# Altium PCB bdcmc.PcbDoc (part 1 of 2)
Units mm, origin at the board's own origin, x right, y up, seen from the top; angles counter-clockwise.
Board outline 100.53 x 64.8 mm, 4 copper layers (Top Layer, Layer 1, Layer 2, Bottom Layer), stack 1.601 mm thick; 206 components, 95 nets, 604 pads, 256 vias.
Unrouted connection lines stored in the file: 2.
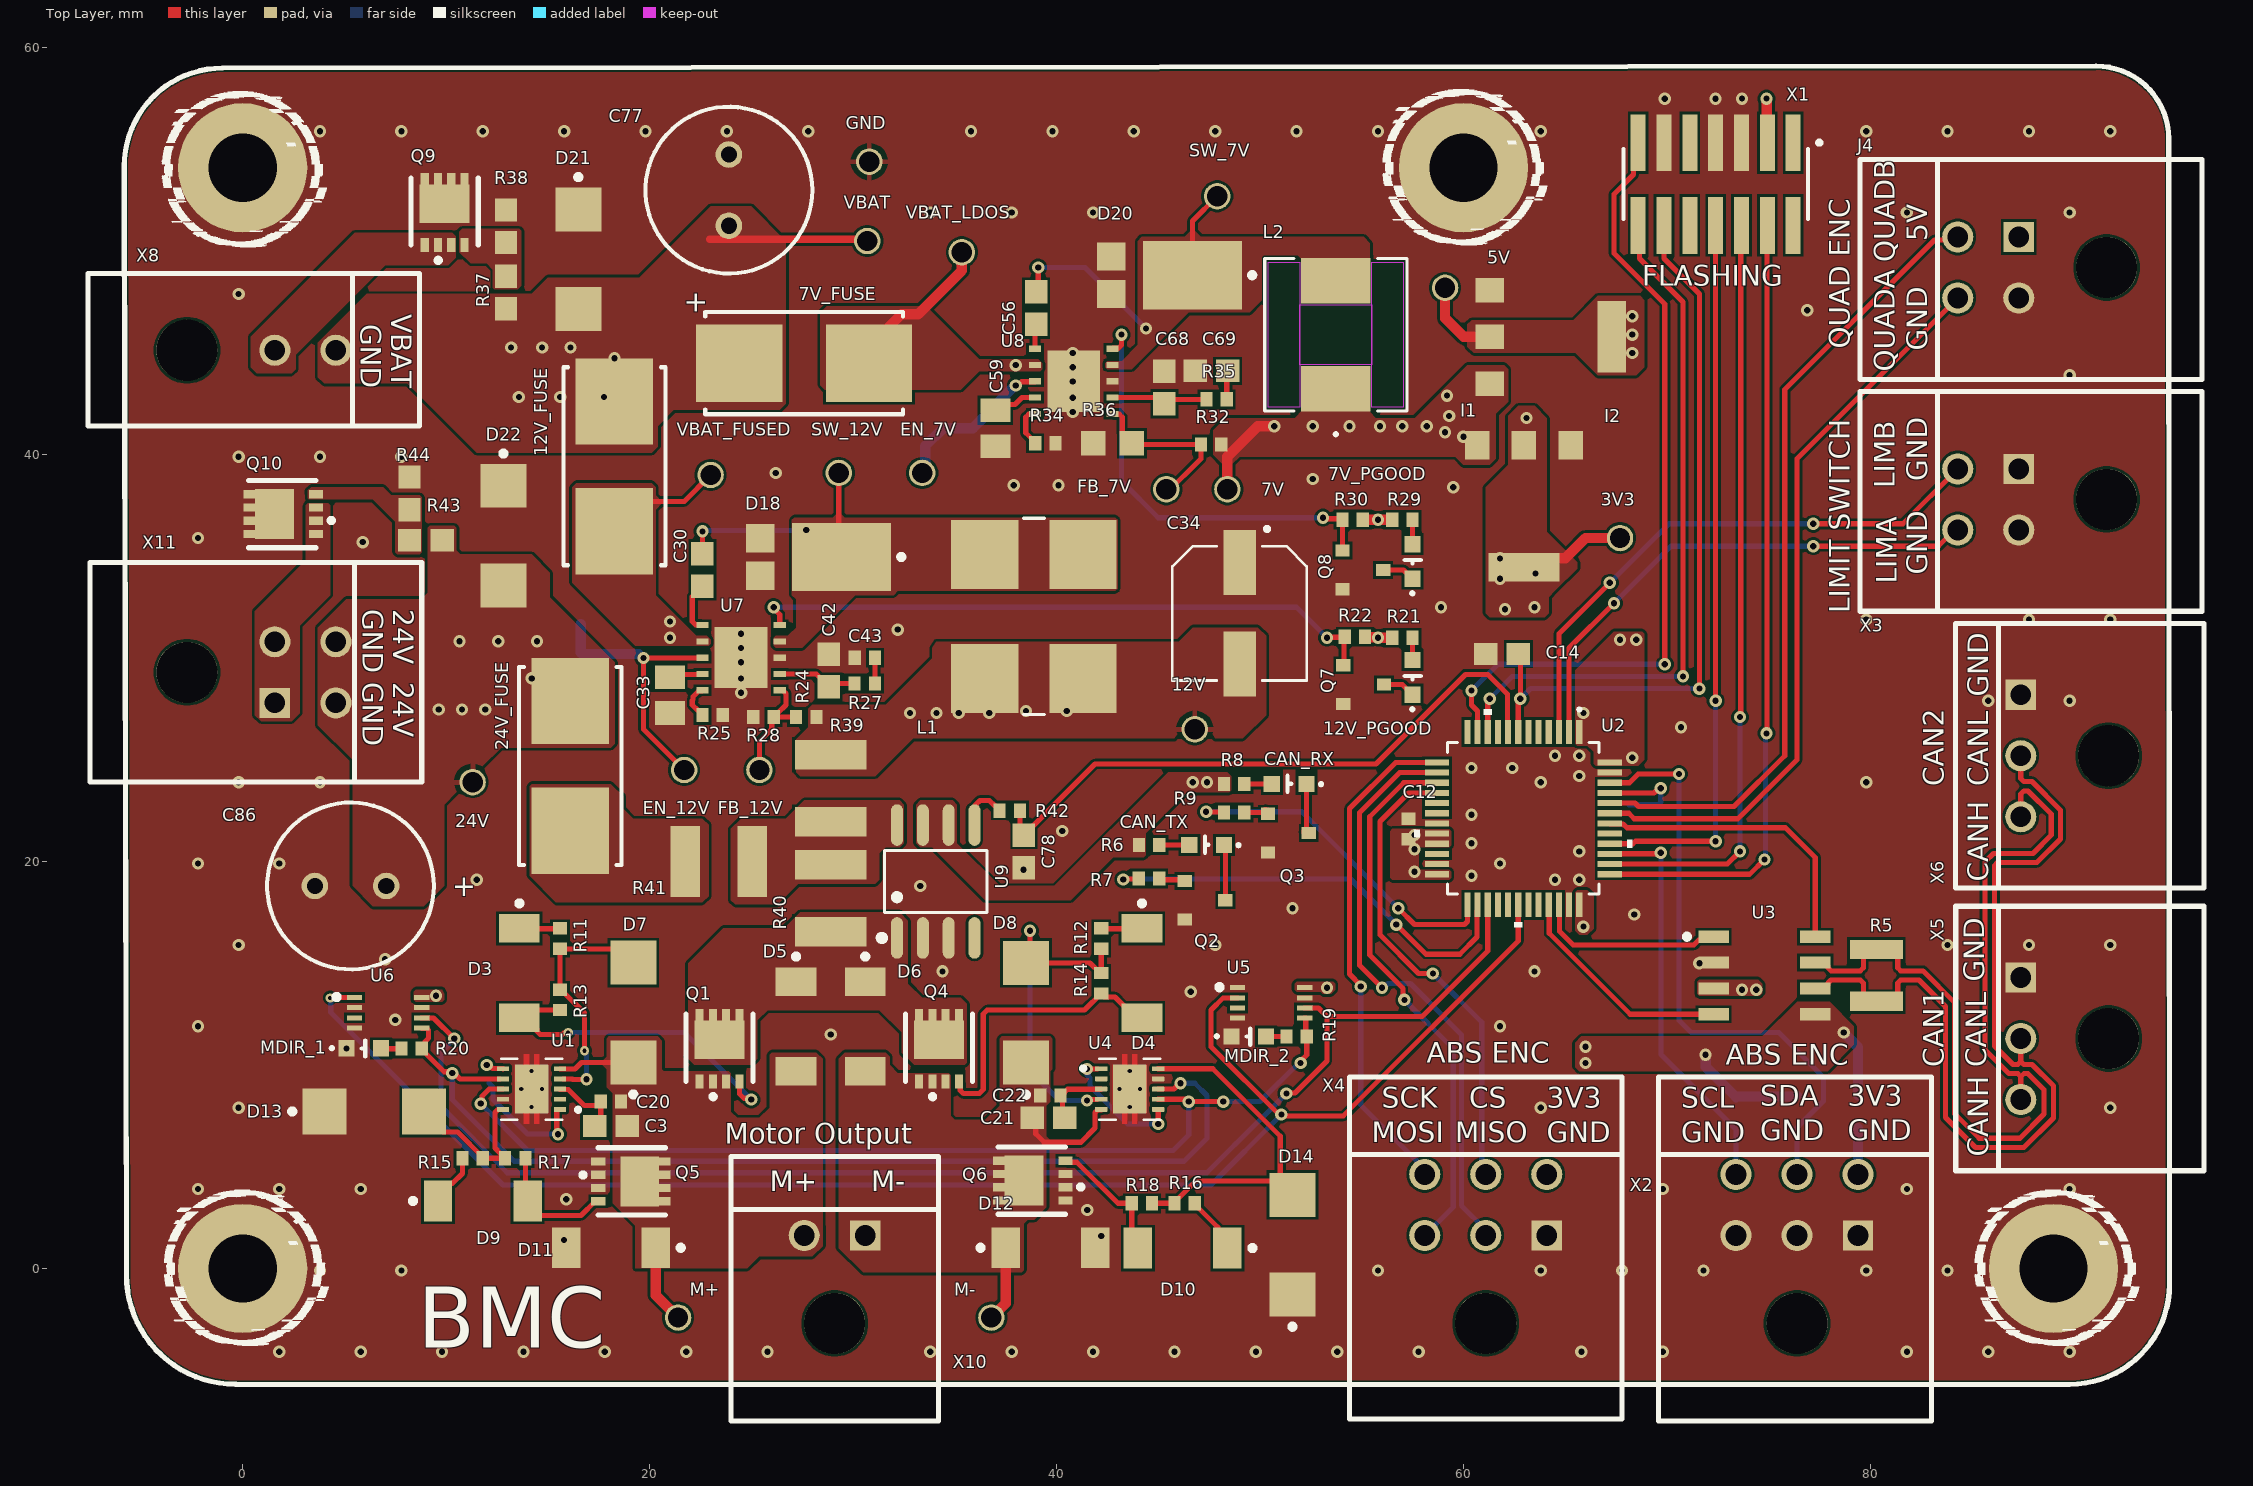
[diagram p0: Top Layer view]
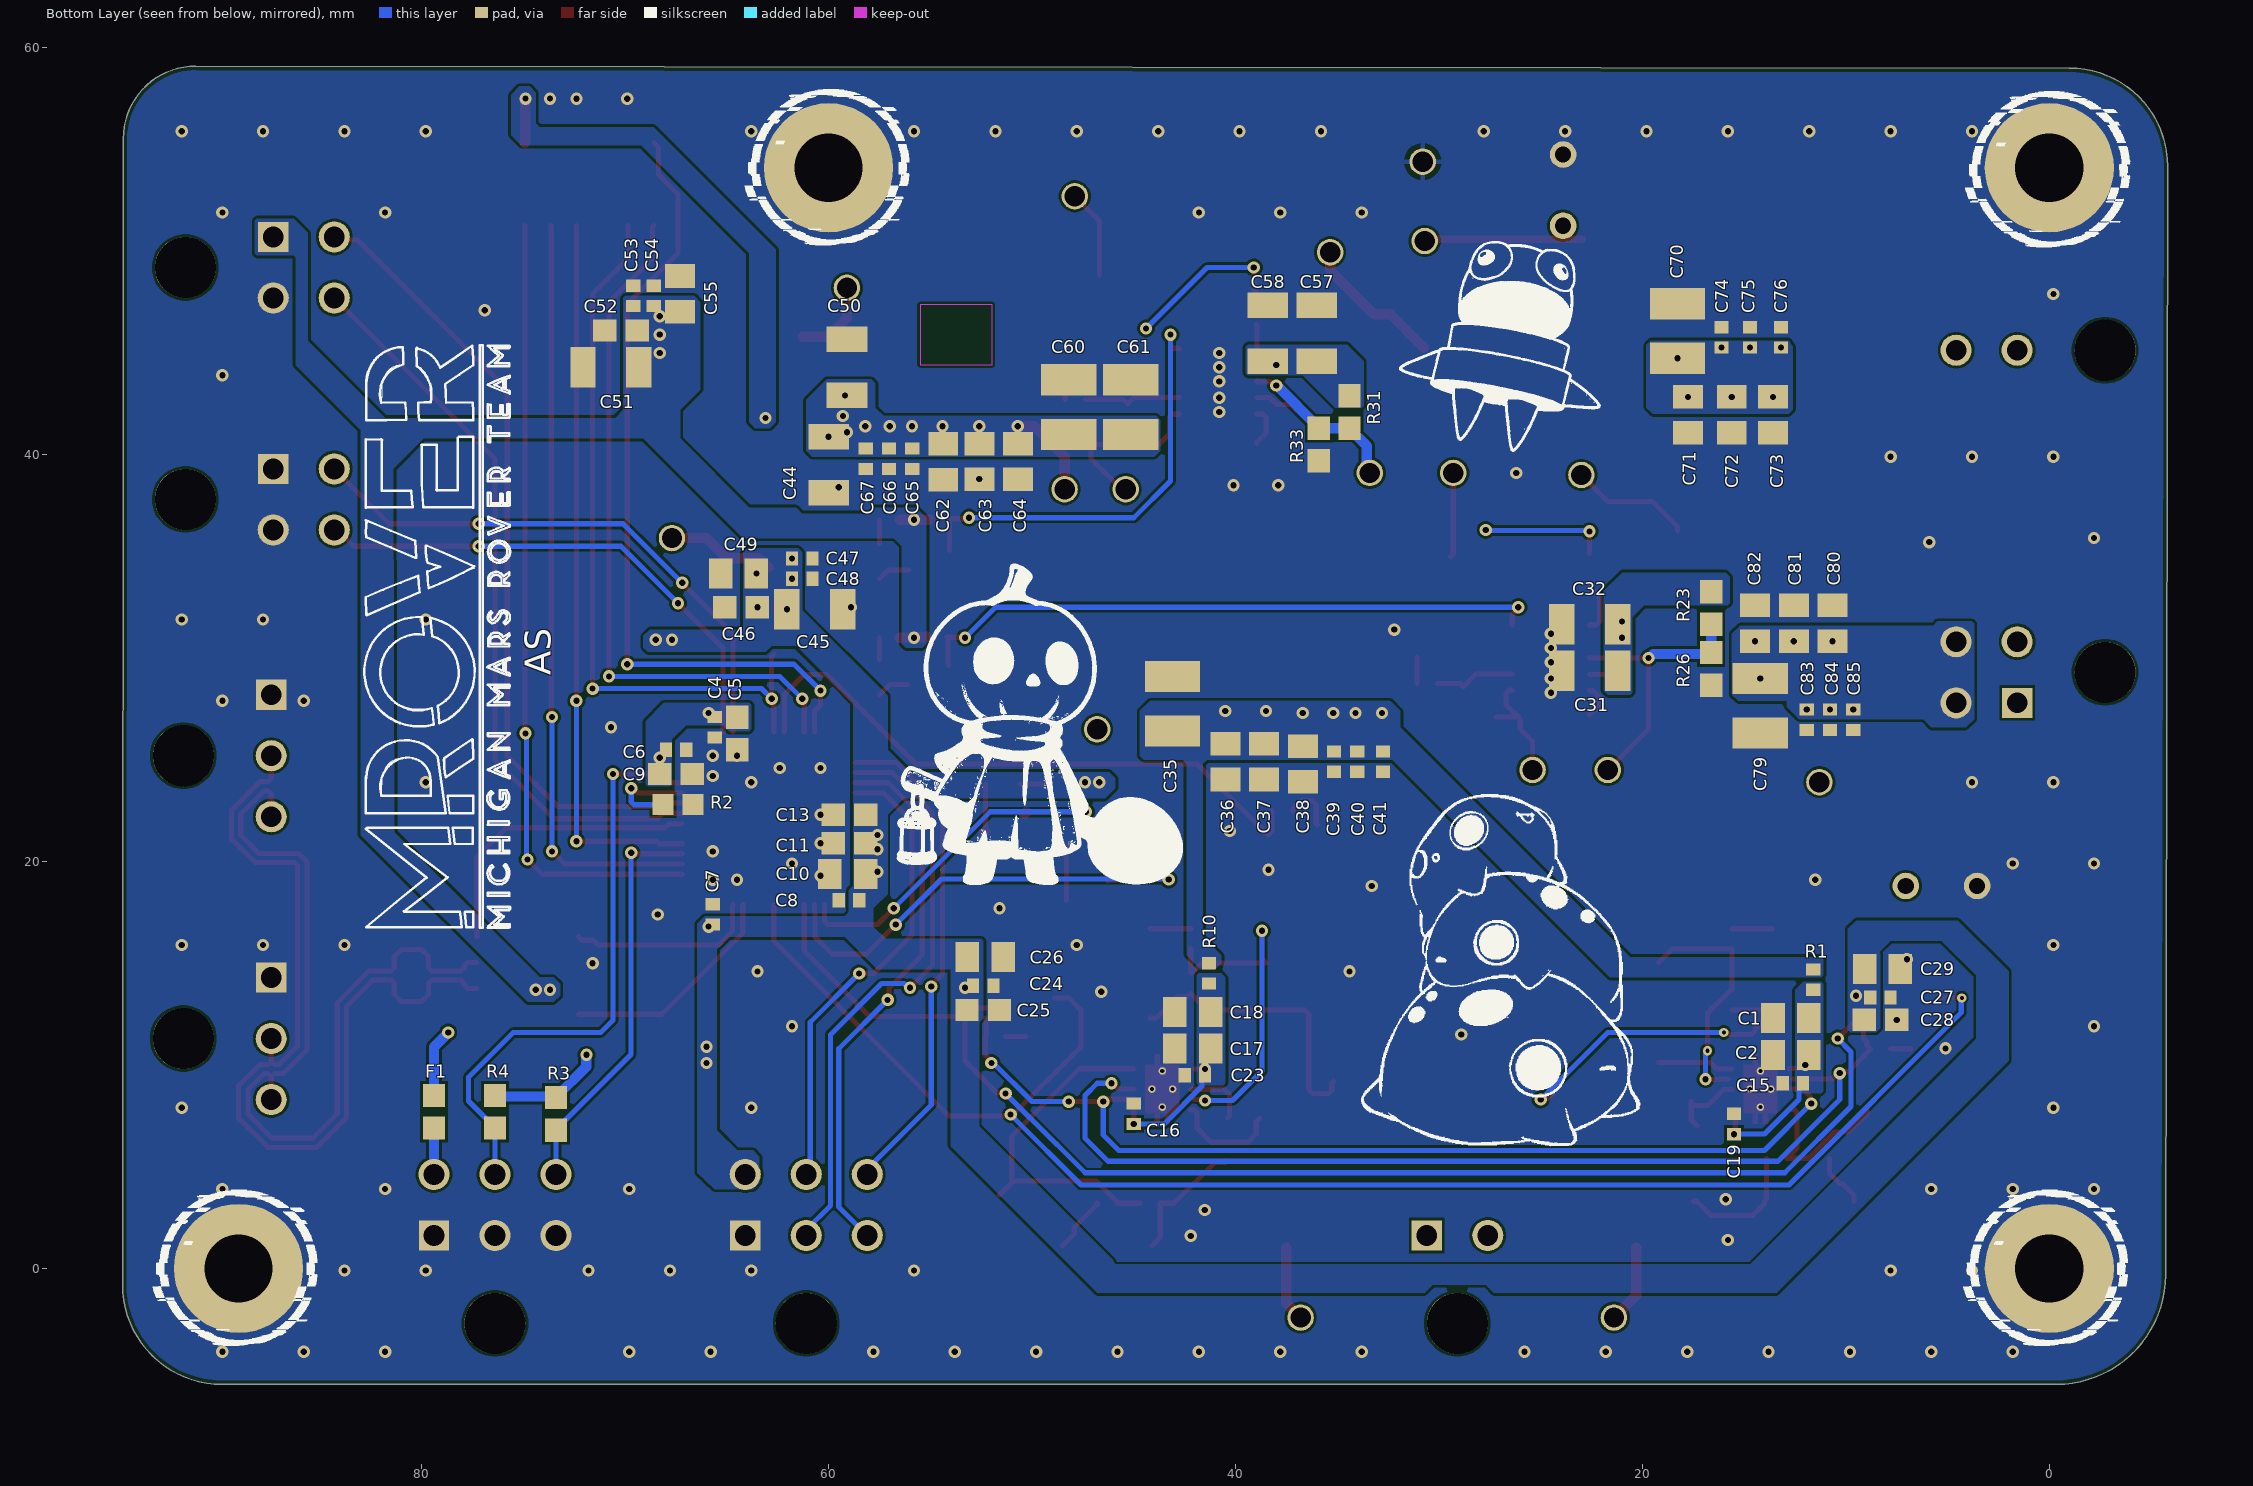
[diagram p1: Bottom Layer view, seen from below]
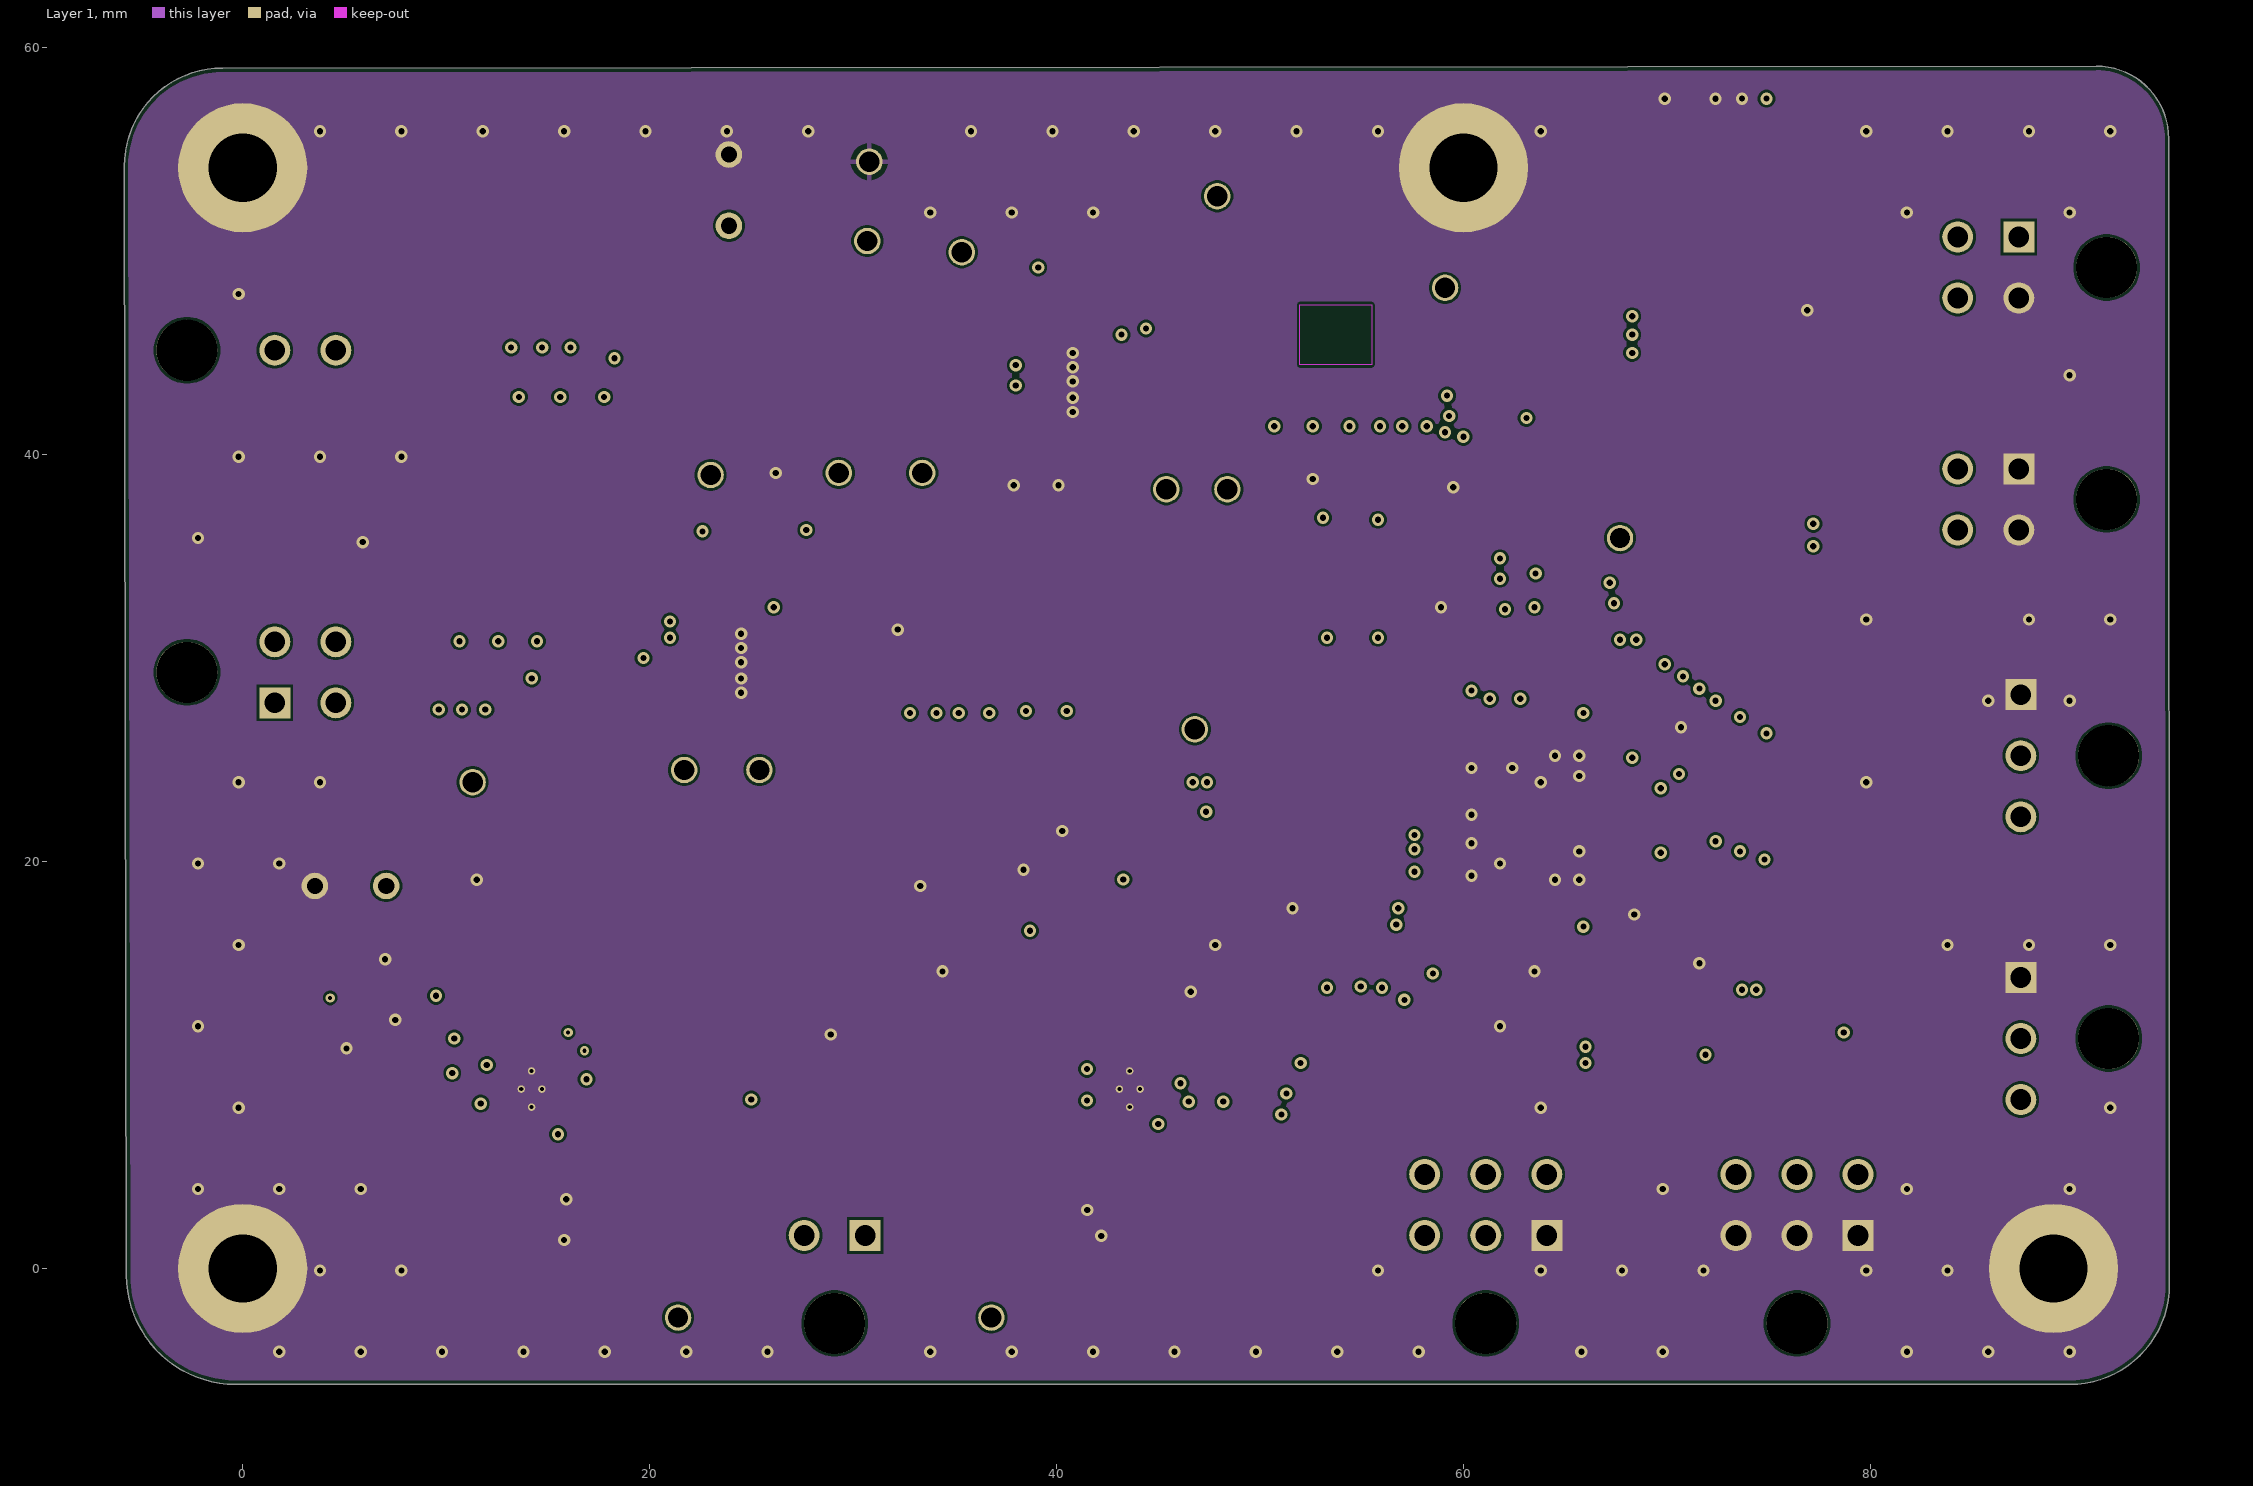
[diagram p2: Layer 1]
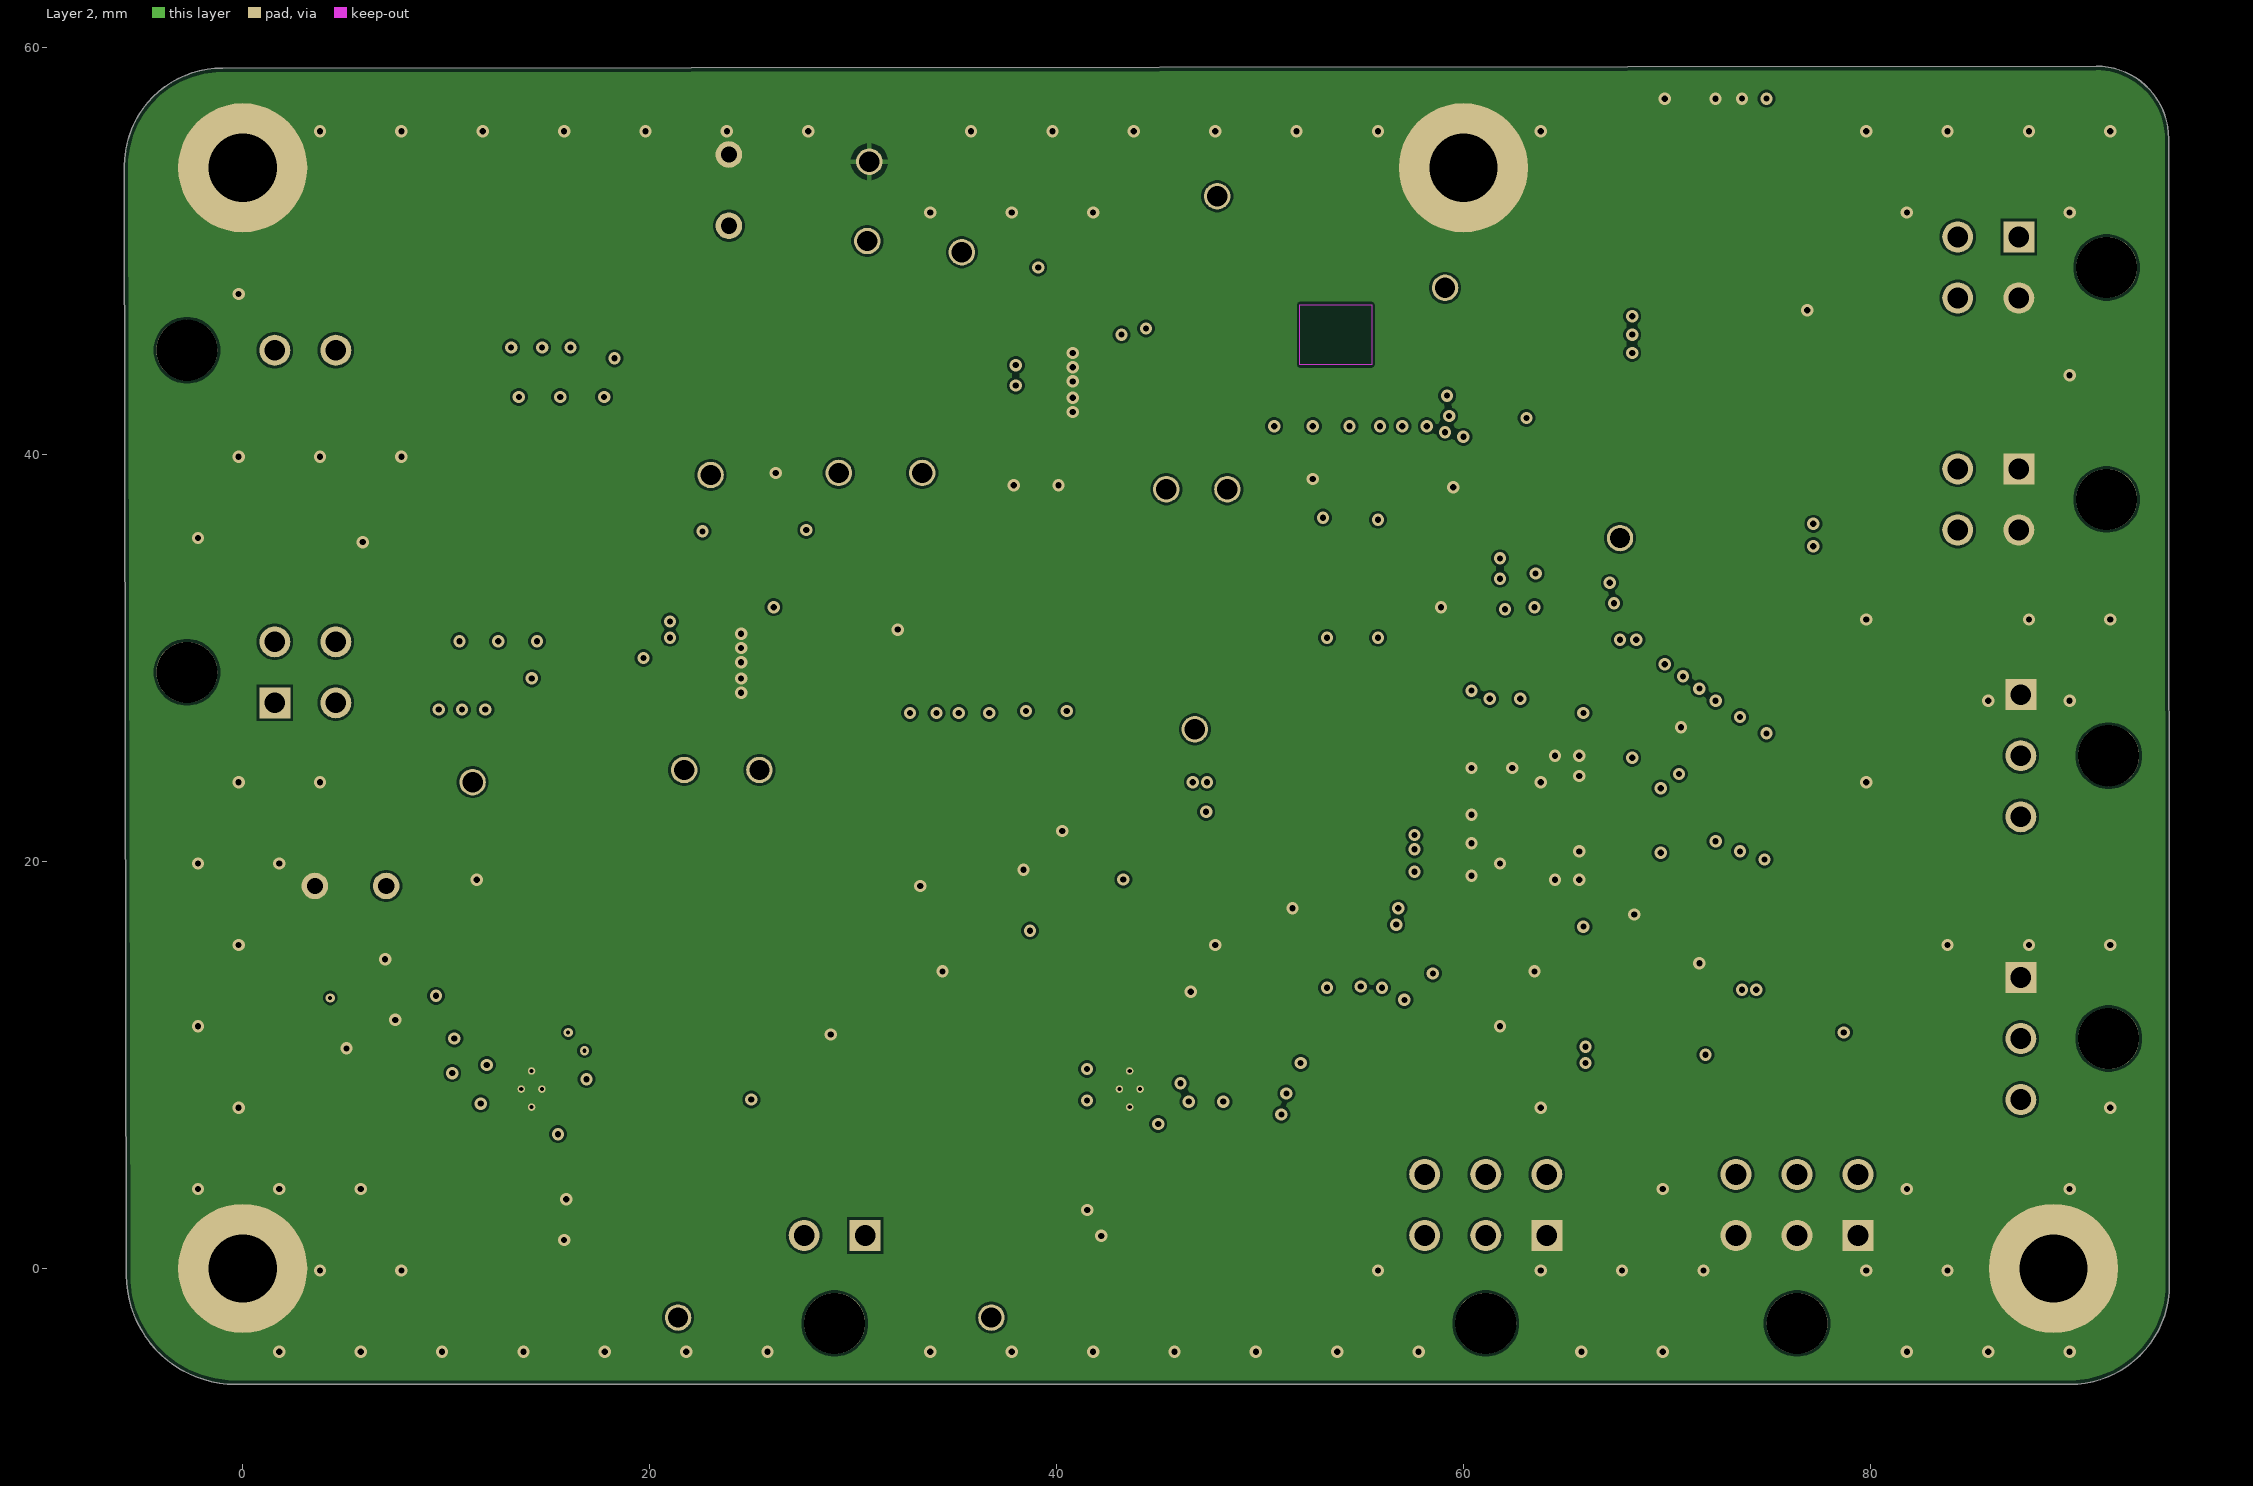
[diagram p3: Layer 2]

## Layer stack, top to bottom
Top Solder: solder mask 0.0102, Solder Resist, Dk 3.5
Top Layer: signal copper 0.0356
Dielectric 2: prepreg 0.25, PP-006, Dk 4.1
Layer 1: signal copper 0.035
Dielectric 1: dielectric 0.96, FR-4, Dk 4.8
Layer 2: signal copper 0.035
Dielectric 3: prepreg 0.25, PP-006, Dk 4.1
Bottom Layer: signal copper 0.0356
Bottom Solder: solder mask 0.0102, Solder Resist, Dk 3.5

## Board outline
-5.713,-0.326 -5.819,54.174 cw(c-0.992,54.174) -0.992,59.001 91.104,59.099 cw(c91.104,55.533) 94.67,55.533 94.708,-0.7 94.708,-0.792 cw(c89.8,-0.792) 89.8,-5.7 89.8,-5.704 -0.343,-5.696 cw(c-0.343,-0.326)

## Design rules (kind name [scope] priority, off if disabled: settings)
BoardOutlineClearance [All] p1: gap=0.2 ignorepadtopadclearanceinfootprint=FALSE
Clearance [All] p1: gap=0.127 ignorepadtopadclearanceinfootprint=TRUE
ComponentClearance [All] p1: gap=0.102 collisioncheckmode=3 verticalgap=0.102 showdistances=TRUE
DiffPairsRouting CAN [InDifferentialPair('CAN')] p1: maxlimit=0.3 minlimit=0.128 mostfreqgap=0.2 toplayer_minwidth=0.254 toplayer_maxwidth=0.381 toplayer_prefwidth=0.254 midlayer1_minwidth=0.254 midlayer1_maxwidth=0.381 midlayer1_prefwidth=0.254 midlayer2_minwidth=0.254 midlayer2_maxwidth=0.381 midlayer2_prefwidth=0.254 bottomlayer_minwidth=0.254 bottomlayer_maxwidth=0.381 bottomlayer_prefwidth=0.254 maxuncoupledlength=12.7
DiffPairsRouting [InDifferentialPair('CAN')] p2: maxlimit=0.102 minlimit=0.102 mostfreqgap=0.102 toplayer_minwidth=0.102 toplayer_maxwidth=1816.048 toplayer_prefwidth=0.254 midlayer1_minwidth=0.102 midlayer1_maxwidth=1816.048 midlayer1_prefwidth=0.254 midlayer2_minwidth=0.102 midlayer2_maxwidth=1816.048 midlayer2_prefwidth=0.254 bottomlayer_minwidth=0.102 bottomlayer_maxwidth=1816.048 bottomlayer_prefwidth=0.254 maxuncoupledlength=12.7
Height [All] p1: minheight=0 maxheight=1816.048 prefheight=12.7
HoleSize [All] p1: absolutevalues=TRUE maxlimit=6.3 minlimit=0.2 maxpercent=80.000 minpercent=20.000
HoleToHoleClearance [All] p1: gap=0.25 allowstackedmicrovias=FALSE
MinimumAnnularRing [All] p1: minimumring=0.076
MinimumSolderMaskSliver [All] p1: minsoldermaskwidth=0
PlaneClearance [All] p1: clearance=0.102
PlaneConnect PlaneConnectPowerPads [InPadClass('PowerPads')] p1: planeconnectstyle=Direct reliefexpansion=0.508 reliefentries=4 reliefconductorwidth=0.254 reliefairgap=0.254
PlaneConnect [All] p2: pad.planeconnectstyle=Relief pad.reliefexpansion=0.3 pad.reliefentries=4 pad.reliefconductorwidth=0.102 pad.reliefairgap=0.102 via.planeconnectstyle=Direct via.reliefexpansion=0.3 via.reliefentries=4 via.reliefconductorwidth=0.127 via.reliefairgap=0.127
PolygonConnect PolygonConnectPowerPads [All vs (InPadClass('PowerPads'))] p1: connectstyle=Direct reliefconductorwidth=0.254 reliefentries=4 polygonreliefangle="90 Angle" airgapwidth=0.254
PolygonConnect [All] p2: connectstyle=Direct reliefconductorwidth=0.102 reliefentries=4 polygonreliefangle="90 Angle" airgapwidth=0.102
RoutingVias [All] p1: holewidth=0.2 width=0.45 viastyle="Through Hole" minholewidth=0.2 minwidth=0.45 maxholewidth=6.3 maxwidth=6.55
SilkToSilkClearance [All] p1: silktosilkclearance=0
SilkToSolderMaskClearance [IsPad] p1: minsilkscreentomaskgap=0.102 clearancetoexposedcopper=TRUE
SolderMaskExpansion [All] p1: expansion=0.075 istentingtop=FALSE
SupplyNets "Schematic Supply Nets_11" [InNet('VBAT_Fused')] p1: voltage=0.000
SupplyNets "Schematic Supply Nets_10" [InNet('7V')] p2: voltage=0.000
SupplyNets "Schematic Supply Nets_9" [InNet('12V')] p3: voltage=0.000
SupplyNets "Schematic Supply Nets_8" [InNet('12/24V')] p4: voltage=0.000
SupplyNets "Schematic Supply Nets_7" [InNet('12/24VC')] p5: voltage=0.000
SupplyNets "Schematic Supply Nets_6" [InNet('24V')] p6: voltage=0.000
SupplyNets "Schematic Supply Nets_5" [InNet('VBAT_LDOS')] p7: voltage=0.000
SupplyNets "Schematic Supply Nets_4" [InNet('5V')] p8: voltage=0.000
SupplyNets "Schematic Supply Nets_3" [InNet('24VPDB')] p9: voltage=0.000
SupplyNets "Schematic Supply Nets_2" [InNet('3V3')] p10: voltage=0.000
SupplyNets "Schematic Supply Nets_1" [InNet('VBAT')] p11: voltage=0.000
SupplyNets "Schematic Supply Nets" [InNet('GND')] p12: voltage=0.000
Width [All] p1: maxlimit=0.635 minlimit=0.203 preferedwidth=0.254
20 further rules are at their usual default settings.

## Classes and differential pairs
differential pair class CAN: CAN
component class U_Power_Regulation: 3V3 5V 7V 7V_PGOOD 12V 12V_PGOOD C30 C31 C32 C33 C34 C35 C36 C37 C38 C39 C40 C41 C42 C43 C44 C45 C46 C47 C48 C49 C50 C51 C52 C53 C54 C55 C56 C57 C58 C59 C60 C61 C62 C63 C64 C65 C66 C67 C68 C69 D18 D20 EN_7V EN_12V FB_7V FB_12V I1 I2 L1 L2 Q7 Q8 R21 R22 R23 R24 R25 R26 R27 R28 R29 R30 R31 R32 R33 R34 R35 R36 SW_7V SW_12V U7 U8 VBAT_FUSED VBAT_LDOS
component class U_Motor_Control: C1 C2 C3 C15 C16 C17 C18 C19 C20 C21 C22 C23 C24 C25 C26 C27 C28 C29 C78 D3 D4 D5 D6 D7 D8 D9 D10 D11 D12 D13 D14 M+ M- MDIR_1 MDIR_2 Q1 Q4 Q5 Q6 R1 R10 R11 R12 R13 R14 R15 R16 R17 R18 R19 R20 R39 R40 R41 R42 U1 U4 U5 U6 U9 X10
component class U_MCU: C4 C5 C6 C7 C8 C9 C10 C11 C12 C13 C14 F1 J4 R2 R3 R4 U2 X1 X2 X3 X4
component class U_Input_Power: 7V_FUSE 12V_FUSE 24V 24V_FUSE C70 C71 C72 C73 C74 C75 C76 C77 C79 C80 C81 C82 C83 C84 C85 C86 D21 D22 GND Q9 Q10 R37 R38 R43 R44 VBAT X8 X11
component class U_CAN: CAN_RX CAN_TX Q2 Q3 R5 R6 R7 R8 R9 U3 X5 X6
differential pair CAN: +CAN_H -CAN_L

## Components (designator, comment, footprint, x,y, rotation, side; value= is the part's Value field where it differs from the comment)
3V3 "5003" TEST-POINT-0001#1 67.7,35.9 r270 top
5V "5003" TEST-POINT-0001#1 59.1,48.2 r180 top
7V "5003" TEST-POINT-0001#1 48.4,38.3 r0 top
7V_FUSE "01550900M" FUSE-0001 27.6,44.5 r0 top
7V_PGOOD "BL-HKC36G-AV-TRB" LED-0603 58.251,33.311 r90 top
12V "5003" TEST-POINT-0001#1 46.8,26.5 r0 top
12V_FUSE "01550900M" FUSE-0001 18.274,39.429 r270 top
12V_PGOOD "BL-HKC36G-AV-TRB" LED-0603 58.251,27.611 r90 top
24V "5003" TEST-POINT-0001#1 11.3,23.9 r0 top
24V_FUSE "01550900M" FUSE-0001 16.1,24.7 r270 top
C1 "CC0805KKX7R9BB105" CAP-0805 12.7,12.3 r0 bottom
C2 "GRM2195C1H103JA01D" CAP-0805 12.7,10.5 r0 bottom
C3 "CC0603KRX7R0BB104" CAP-0603 18.1,7 r0 top
C4 "CC0402KRX7R7BB104" CAP-0402 65.6,26.6 r270 bottom
C5 "CC0603KRX5R8BB475" CAP-0603 64.5,26.3 r270 bottom
C6 "CC0402KRX7R7BB104" CAP-0402 67.5,25.5 r180 bottom
C7 "CC0402KRX7R7BB104" CAP-0402 65.7,17.4 r90 bottom
C8 "CC0402KRX7R7BB104" CAP-0402 59,18.1 r0 bottom
C9 "CC0603KRX5R8BB475" CAP-0603 67.5,24.3 r180 bottom
C10 "GRM2195C1H103JA01D" CAP-0805 59.062,19.38 r0 bottom
C11 "CC0603KRX7R7BB105" CAP-0603 58.982,20.904 r0 bottom
C12 "CC0402KRX7R7BB104" CAP-0402 57.3,21.6 r90 top
C13 "CC0603KRX7R7BB105" CAP-0603 58.982,22.301 r0 bottom
C14 "CC0603KRX7R0BB104" CAP-0603 61.9,30.2 r180 top
C15 "CC0402KRX7R9BB102" CAP-0402 12.6,9.1 r0 bottom
C16 "CC0402KRX7R9BB102" CAP-0402 45,7.6 r90 bottom
C17 "GRM2195C1H103JA01D" CAP-0805 42.1,10.8 r0 bottom
C18 "CC0805KKX7R9BB105" CAP-0805 42.1,12.6 r0 bottom
C19 "CC0402KRX7R9BB102" CAP-0402 15.5,7.1 r90 bottom
C20 "CC0402KRX7R9BB102" CAP-0402 18.1,8.2 r0 top
C21 "CC0603KRX7R0BB104" CAP-0603 39.6,7.4 r180 top
C22 "CC0402KRX7R9BB102" CAP-0402 39.7,8.5 r180 top
C23 "CC0402KRX7R9BB102" CAP-0402 42,9.5 r0 bottom
C24 "CC0402KRX7R9BB102" CAP-0402 52.4,13.9 r180 bottom
C25 "CC0603KRX7R0BB104" CAP-0603 52.4,12.7 r180 bottom
C26 "CC0805KKX7R9BB105" CAP-0805 52.3,15.3 r180 bottom
C27 "CC0402KRX7R9BB102" CAP-0402 8.3,13.316 r180 bottom
C28 "CC0603KRX7R0BB104" CAP-0603 8.3,12.216 r180 bottom
C29 "CC0805KKX7R9BB105" CAP-0805 8.2,14.716 r180 bottom
C30 "CC0603KRX7R0BB104" CAP-0603 22.592,34.336 r90 top
C31 "CC1206KKX7R0BB225" CAP-1206 22.592,29.383 r0 bottom
C32 "CC1206KKX7R0BB225" CAP-1206 22.592,31.669 r0 bottom
C33 "GRM2165C1H272JA01D" CAP-0805 21,28.18 r270 top
C34 "EEH-ZC1V470P" CAP-Radial-SMD 49,32.2 r270 top
C35 "CL32B106KBJNNNE" CAP-1210 43.1,27.759 r90 bottom
C36 "CC0805KKX7R9BB105" CAP-0805 40.499,24.911 r270 bottom
C37 "CC0805KRX7R9BB104" CAP-0805 38.594,24.911 r270 bottom
C38 "GRM2195C1H103JA01D" CAP-0805 36.689,24.793 r270 bottom
C39 "CC0402KRX7R9BB102" CAP-0402 35.165,24.911 r270 bottom
C40 "CC0402JRNPO9BN101" CAP-0402 34.022,24.911 r270 bottom
C41 "CC0402JRNPO9BN100" CAP-0402 32.752,24.911 r270 bottom
C42 "CC0603CRNPO0BN6R8" CAP-0603 28.799,29.383 r90 top
C43 "0402N511J500CT" CAP-0402 30.585,30.018 r180 top
C44 "293D106X9016A2TE3" CAP-1206 60,39.5 r270 bottom
C45 "293D106X9016A2TE3" CAP-1206 60.675,32.4 r180 bottom
C46 "CC0603KRX5R6BB106" CAP-0603 64.3,32.5 r0 bottom
C47 "CC0402KRX7R7BB104" CAP-0402 61.3,34.9 r180 bottom
C48 "CC0402KRX7R7BB104" CAP-0402 61.3,33.9 r180 bottom
C49 "CC0805JRNPO9BN471" CAP-0805 64.432,34.159 r0 bottom
C50 "293D106X9016A2TE3" CAP-1206 59.1,44.3 r90 bottom
C51 "293D106X9016A2TE3" CAP-1206 70.7,44.3 r0 bottom
C52 "CC0603KRX5R6BB106" CAP-0603 70.2,46.1 r0 bottom
C53 "CC0402KRX7R7BB104" CAP-0402 69.6,47.8 r90 bottom
C54 "CC0402KRX7R7BB104" CAP-0402 68.6,47.8 r90 bottom
C55 "CC0805JRNPO9BN471" CAP-0805 67.3,47.9 r90 bottom
C56 "CC0603KRX7R0BB104" CAP-0603 39,47.2 r90 top
C57 "CC1206KKX7R0BB225" CAP-1206 36.003,45.966 r90 bottom
C58 "CC1206KKX7R0BB225" CAP-1206 38.416,45.966 r90 bottom
C59 "GRM2165C1H272JA01D" CAP-0805 37,41.3 r270 top
C60 "C3225X7R1N106K250AC" CAP-1210 48.197,42.337 r90 bottom
C61 "CL32B106KBJNNNE" CAP-1210 45.149,42.337 r90 bottom
C62 "CC0805KKX7R9BB105" CAP-0805 54.366,39.652 r270 bottom
C63 "CC0805KRX7R9BB104" CAP-0805 52.588,39.661 r270 bottom
C64 "GRM2195C1H103JA01D" CAP-0805 50.683,39.661 r270 bottom
C65 "CC0402KRX7R9BB102" CAP-0402 55.89,39.797 r270 bottom
C66 "CC0402JRNPO9BN101" CAP-0402 57.033,39.797 r270 bottom
C67 "CC0402JRNPO9BN100" CAP-0402 58.176,39.797 r270 bottom
C68 "CC0603CRNPO0BN6R8" CAP-0603 45.3,43.3 r90 top
C69 "GRM1885C1H302JA01D" CAP-0603 47.616,44.115 r180 top
C70 "CL32B106KBJNNNE" CAP-1210 18.274,46.076 r90 bottom
C71 "CC0805KKX7R9BB105" CAP-0805 17.766,41.956 r270 bottom
C72 "CC0805KRX7R9BB104" CAP-0805 15.607,41.956 r270 bottom
C73 "GRM2195C1H103JA01D" CAP-0805 13.575,41.956 r270 bottom
C74 "CC0402KRX7R9BB102" CAP-0402 16.115,45.766 r90 bottom
C75 "CC0402JRNPO9BN101" CAP-0402 14.718,45.766 r90 bottom
C76 "CC0402JRNPO9BN100" CAP-0402 13.194,45.766 r90 bottom
C77 "860040674004" WCAP-ATUL_8X11.5(DXL) 23.9,53 r270 top
C78 "CC0603KRX7R0BB104" CAP-0603 38.4,20.5 r90 top
C79 "CL32B106KBJNNNE" CAP-1210 14.21,27.661 r270 bottom
C80 "CC0805KKX7R9BB105" CAP-0805 10.654,31.712 r90 bottom
C81 "CC0805KRX7R9BB104" CAP-0805 12.559,31.712 r90 bottom
C82 "GRM2195C1H103JA01D" CAP-0805 14.464,31.712 r90 bottom
C83 "CC0402KRX7R9BB102" CAP-0402 11.924,26.97 r270 bottom
C84 "CC0402JRNPO9BN101" CAP-0402 10.781,26.97 r270 bottom
C85 "CC0402JRNPO9BN100" CAP-0402 9.638,26.97 r270 bottom
C86 "860040674004" WCAP-ATUL_8X11.5(DXL) 5.3,18.8 r0 top
CAN_RX "BL-HKC36G-AV-TRB" LED-0603 52.878,24.564 r180 top
CAN_TX "BL-HKC36G-AV-TRB" LED-0603 48.82,21.566 r180 top
D3 "PMEG6030EP,115" DIO-SOD128 13.6,14.516 r180 top
D4 "PMEG6030EP,115" DIO-SOD128 44.2,14.516 r180 top
D5 "PMEG6030EP,115" DIO-SOD128 27.2,11.9 r180 top
D6 "PMEG6030EP,115" DIO-SOD128 30.6,11.9 r180 top
D7 "SMBJ12CA" "DO-214AA (SMBJ)" 19.2,12.616 r270 top
D8 "SMBJ12CA" "DO-214AA (SMBJ)" 38.5,12.6 r270 top
D9 "PMEG6030EP,115" DIO-SOD128 11.8,3.316 r270 top
D10 "PMEG6030EP,115" DIO-SOD128 46.2,1 r90 top
D11 "PMEG6030EP,115" DIO-SOD128 18.1,1.016 r90 top
D12 "PMEG6030EP,115" DIO-SOD128 39.7,1.016 r270 top
D13 "SMBJ12CA" "DO-214AA (SMBJ)" 6.5,7.716 r180 top
D14 "SMBJ12CA" "DO-214AA (SMBJ)" 51.6,1.2 r270 top
D18 "PDS760-13" DO-POWERDI5 28.307,34.971 r0 top
D20 "PDS760-13" DO-POWERDI5 45.556,48.82 r0 top
D21 "SMBJ40CA" "DO-214AA (SMBJ)" 16.496,49.576 r90 top
D22 "SMBJ40CA" "DO-214AA (SMBJ)" 12.813,35.987 r90 top
EN_7V "5003" TEST-POINT-0001#1 33.4,39.1 r90 top
EN_12V "5003" TEST-POINT-0001#1 21.7,24.5 r90 top
F1 "0467.250NRHF" RES-0603 79.4,7.7 r270 bottom
FB_7V "5003" TEST-POINT-0001#1 45.4,38.3 r90 top
FB_12V "5003" TEST-POINT-0001#1 25.4,24.5 r90 top
GND "5003" TEST-POINT-0001#1 30.8,54.4 r90 top
I1 "LM1117IMPX-3.3/NOPB" IC-SOT-223-4 62.973,37.46 r270 top
I2 "LM1117MPX-5.0/NOPB" IC-SOT-223-4 64.288,45.79 r0 top
J4 "FTSH-107-01-L-DV-K" SAMTEC_FTSH-107-01-L-DV-K 72.4,53.3 r180 top
L1 "CSAD1010-150M" IND-15U-0002 33.299,27.476 r0 top
L2 "IHLP2525CZER100M11" IND_IHLP_2525_CZ_VIS 53.731,45.893 r90 top
M+ "5003" TEST-POINT-0001#2 21.4,-2.6 r270 top
M- "5003" TEST-POINT-0001#1 36.8,-2.416 r270 top
MDIR_1 "BL-HKC36G-AV-TRB" LED-0603 4.509,10.065 r0 top
MDIR_2 "BL-HKC36G-AV-TRB" LED-0603 48.009,10.649 r0 top
Q1 "CSD17575Q3" IC-8VSONCLIP 21.6,8.316 r0 top
Q2 "T2N7002AK,LM" IC-SOT23-3 47.3,18.1 r270 top
Q3 "T2N7002AK,LM" IC-SOT23-3 51.4,21.4 r270 top
Q4 "CSD17575Q3" IC-8VSONCLIP 32.388,8.316 r0 top
Q5 "CSD17575Q3" IC-8VSONCLIP 16.6,6.116 r270 top
Q6 "CSD17575Q3" IC-8VSONCLIP 41.317,2.479 r90 top
Q7 "T2N7002AK,LM" IC-SOT23-3 55.1,28.7 r270 top
Q8 "T2N7002AK,LM" IC-SOT23-3 55.058,34.336 r270 top
Q9 "CSD18543Q3AT" IC-8VSONCLIP 8.088,49.423 r0 top
Q10 "CSD18543Q3AT" IC-8VSONCLIP 4.477,35.238 r90 top
R1 "ERJ2GEJ1R0X" RES-0402 11.6,14.2 r90 bottom
R2 "RESC1607X60N" RESC1607X60N 67.4,22.8 r0 bottom
R3 "RC0603FR-074K7L" RES-0603 73.4,7.6 r90 bottom
R4 "RC0603FR-074K7L" RES-0603 76.4,7.7 r90 bottom
R5 "RC1210FR-07120RL" RES-1210 80.3,14.4 r270 top
R6 "RC0402FR-07100RL" RES-0402 44.556,20.815 r180 top
R7 "RC0402FR-07470RL" RES-0402 44.548,19.164 r180 top
R8 "RC0402FR-07100RL" RES-0402 48.733,23.813 r180 top
R9 "RC0402FR-07470RL" RES-0402 48.733,22.416 r180 top
R10 "ERJ2GEJ1R0X" RES-0402 41.3,14.5 r90 bottom
R11 "RC0402FR-7W33RL" RES-0402 15.6,16.216 r90 top
R12 "RC0402FR-7W33RL" RES-0402 42.2,16.216 r90 top
R13 "RC0402FR-7W33RL" RES-0402 15.6,13.2 r270 top
R14 "RC0402FR-7W33RL" RES-0402 42.2,14.016 r270 top
R15 "RC0402FR-7W33RL" RES-0402 11.3,5.416 r180 top
R16 "RC0402FR-7W33RL" RES-0402 46.3,3.2 r0 top
R17 "RC0402FR-7W33RL" RES-0402 13.4,5.416 r0 top
R18 "RC0402FR-7W33RL" RES-0402 44.2,3.2 r180 top
R19 "RC0402FR-07100RL" RES-0402 51.8,11.4 r180 top
R20 "RC0402FR-07100RL" RES-0402 8.3,10.816 r180 top
R21 "RC0402FR-07240RL" RES-0402 57,31 r0 top
R22 "RC0402FR-071KL" RES-0402 54.669,31.05 r180 top
R23 "RC0603FR-072M15L" RES-0603 16.623,32.469 r270 bottom
R24 "RC0402FR-07147KL" RES-0402 27.7,27.1 r180 top
R25 "RTT021783FTH" RES-0402 23.1,27.2 r0 top
R26 "RC0603FR-07100KL" RES-0603 16.623,29.472 r270 bottom
R27 "RC0402FR-0759KL" RES-0402 30.577,28.748 r0 top
R28 "RC0402FR-0710K5L" RES-0402 25.6,27.1 r180 top
R29 "RC0402FR-07240RL" RES-0402 57,36.8 r0 top
R30 "RC0402FR-071KL" RES-0402 54.558,36.803 r180 top
R31 "RC0603FR-072M15L" RES-0603 34.4,42.1 r270 bottom
R32 "RC0402FR-0780K6L" RES-0402 47.6,40.5 r180 top
R33 "RC0603FR-07100KL" RES-0603 35.9,40.5 r270 bottom
R34 "RTT021783FTH" RES-0402 39.453,40.559 r0 top
R35 "RC0402FR-0736K5L" RES-0402 47.87,42.718 r180 top
R36 "RT0805BRD0710K4L" RES-0805 42.755,40.559 r180 top
R37 "RC0603FR-07200KL" RES-0603 12.94,47.963 r90 top
R38 "RC0603FR-07100KL" RES-0603 12.94,51.227 r90 top
R39 "C337220" RES-2512 28.9,23.6 r270 top
R40 "C337220" RES-2512 28.9,18.2 r90 top
R41 "C337220" RES-2512 23.4,20 r0 top
R42 "RC0402FR-0710KL" RES-0402 37.7,22.5 r0 top
R43 "RC0603FR-07200KL" RES-0603 9,35.8 r180 top
R44 "RC0603FR-07100KL" RES-0603 8.2,38.1 r90 top
SW_7V "5003" TEST-POINT-0001#1 47.9,52.7 r90 top
SW_12V "5003" TEST-POINT-0001#1 29.3,39.1 r90 top
U1 "UCC27282DRCR" IC-10VSON 14.2,8.816 r180 top
U2 "STM32G431CBT6" IC-LQFP48 62.949,22.122 r270 top
U3 "TCAN1044VDRQ1" IC-8SOIC 74.8,14.4 r270 top
U4 "UCC27282DRCR" IC-10VSON 43.6,8.816 r0 top
U5 "SN74LVC2G157DCUR" IC-8VSSOP 48.9,12.3 r0 top
U6 "SN74LVC2G157DCUR" IC-8VSSOP 5.5,11.816 r0 top
U7 "TPS54561DPRR" IC-10WSON 24.497,30.018 r0 top
U8 "TPS54561DPRR" IC-10WSON 40.85,43.607 r0 top
U9 "IC-CURR-0001" IC-CURR 34.067,19.018 r0 top
VBAT "5003" TEST-POINT-0001#1 30.7,50.5 r90 top
VBAT_FUSED "5003" TEST-POINT-0001#1 23,39 r90 top
VBAT_LDOS "5003" TEST-POINT-0001#1 35.348,49.948 r180 top
X1 "Molex - Micro-Fit 3.0 Series connector,  3.00mm (0.118\") pitch header, 4 positions." 43045-0400 91.62,49.2 r90 top
X2 "Molex 43045-0600" 43045-0600 76.4,-2.7 r0 top
X3 "Molex - Micro-Fit 3.0 Series connector,  3.00mm (0.118\") pitch header, 4 positions." 43045-0400 91.62,37.8 r90 top
X4 "Molex 43045-0600" 43045-0600 61.1,-2.7 r0 top
X5 "Molex 43650-0300" 43650-0300 91.72,11.3 r90 top
X6 "Molex 43650-0300" 43650-0300 91.72,25.2 r90 top
X8 "Molex - Micro-Fit 3.0 Series connector,  3.00mm (0.118\") pitch header, 2 positions." 43045-0200 -2.741,45.131 r270 top
X10 "Molex - Micro-Fit 3.0 Series connector,  3.00mm (0.118\") pitch header, 2 positions." 43650-0200 29.1,-2.7 r0 top
X11 "Molex - Micro-Fit 3.0 Series connector,  3.00mm (0.118\") pitch header, 4 positions." 43045-0400 -2.741,29.3 r270 top

## Footprints (in the part's own frame and the unit in brackets; to place one, negate y for a bottom-side part, rotate by r counter-clockwise, add the part's x,y. Pads: shape width x height; smd on the part's side, far side on the other; paste and mask are expansions set on the pad)
43045-0200 [mm]
  round 3 hole 3 unplated: 1(0,0)
  round 1.53 / inner round 1.524 / far side round 1.53 hole 1.02: P$1(0,4.32) P$2(0,7.32)
  body extent -3.62,-4.65 3.52,7.58, height 9.83
43045-0400 [mm]
  round 3 hole 3 unplated: 1(0,0)
  rect 1.482x1.482 / inner rect 1.524x1.524 / far side rect 1.482x1.482 hole 1.02: P$1(1.5,4.32)
  round 1.53 / inner round 1.524 / far side round 1.53 hole 1.02: P$2(-1.5,4.32) P$3(1.5,7.32) P$4(-1.5,7.32)
  body extent -5.07,-4.55 5.08,7.69, height 8.83
43045-0600 [mm]
  round 3 hole 3 unplated: 1(0,0)
  rect 1.482x1.482 / inner rect 1.524x1.524 / far side rect 1.482x1.482 hole 1.02: P$1(3,4.32)
  round 1.53 / inner round 1.524 / far side round 1.53 hole 1.02: P$2(0,4.32) P$3(-3,4.32) P$4(3,7.32) P$5(0,7.32) P$6(-3,7.32)
  body extent -6.6,-4.44 6.55,7.79, height 8.64
43650-0200 [mm]
  round 3 hole 3 unplated: 1(0,0)
  rect 1.482x1.482 / inner rect 1.524x1.524 / far side rect 1.482x1.482 hole 1.02: P$1(1.5,4.32)
  round 1.53 / inner round 1.524 / far side round 1.53 hole 1.02: P$2(-1.5,4.32)
  body extent -4.82,-4.57 4.83,5.33, height 5.68
43650-0300 [mm]
  round 3 hole 3 unplated: 1(0,0)
  rect 1.482x1.482 / inner rect 1.524x1.524 / far side rect 1.482x1.482 hole 1.02: P$1(3,4.32)
  round 1.53 / inner round 1.524 / far side round 1.53 hole 1.02: P$2(0,4.32) P$3(-3,4.32)
  body extent -6.32,-4.57 6.33,5.33, height 5.68
CAP-0402 [mm]
  rect 0.6x0.7 smd: 1(-0.5,0) 2(0.5,0)
  body extent -0.5,-0.22 0.5,0.23, height 0.5
CAP-0603 [mm]
  rect 1.15x1.1 smd: 1(-0.8,0) 2(0.8,0)
  body extent -0.8,-0.45 0.8,0.45, height 0.8
CAP-0805 [mm]
  rect 1.16x1.47 smd: 1(-0.88,0) 2(0.88,0)
  body extent -1,-0.63 1,0.63, height 0.94
CAP-1206 [mm]
  rect 1.25x2 smd: 1(-1.375,0) 2(1.375,0)
  body extent -1.6,-0.8 1.6,0.8, height 1.5
CAP-1210 [mm]
  rect 1.53x2.72 smd: 1(-1.341,0) 2(1.341,0)
  body extent -1.6,-1.25 1.6,1.25, height 2.7
CAP-Radial-SMD [mm]
  rect 3.2x1.6 smd: 1(-2.5,0) 2(2.5,0)
  silkscreen extent -4.25,-3.3 3.3,3.3, body extent -3.65,-3.3 3.65,3.3, height 5.8
DIO-SOD128 [mm]
  rect 2x1.4 smd: 1(0,2.2) 2(0,-2.2)
  silkscreen extent -0.13,-3.55 0.12,-3.3, body extent -1.25,-2.35 1.25,2.35, height 1.05
"DO-214AA (SMBJ)" [mm]
  rect 2.16x2.26 smd: 1(-2.416,0) 2(2.484,0)
  silkscreen extent 3.94,-0.12 4.19,0.13, body extent -2.72,-1.95 2.78,1.95, height 2.45
DO-POWERDI5 [mm] "SMD, 3-Leads, Body 3.975x5.375mm, Pitch 1.84mm"
  rect 1.4x1.39 smd: 1(-2.856,0.92) 1(-2.856,-0.92)
  rect 4.86x3.36 smd: 2(1.126,0)
  silkscreen extent 3.94,-0.12 4.19,0.12, body extent -3.25,-1.98 3.25,1.98, height 1.15
FUSE-0001 [mil]
  rect 167x150 smd paste+0 mask+0: 1(-125.5,0) 2(125.5,0)
  silkscreen extent -192,-99 192,99, body extent -213,-103 213,103, height 10
IC-8SOIC [mm]
  rect 0.6x1.5 smd: 1(-1.905,-2.5) 2(-0.635,-2.5) 3(0.635,-2.5) 4(1.905,-2.5) 5(1.905,2.5) 6(0.635,2.5) 7(-0.635,2.5) 8(-1.905,2.5)
  silkscreen extent -2.03,-3.93 -1.78,-3.68, body extent -2.45,-3 2.45,3, height 1.75
IC-8VSONCLIP [mm]
  rect 0.4x0.7 smd paste-100 mask+0.05: 1(2.812,0.877) 2(0.862,0.877) 2(1.512,0.877) 2(2.162,0.877) 3(0.862,4.077) 3(1.512,4.077) 3(2.162,4.077) 3(2.812,4.077)
  rect 2.45x1.9 smd paste-100 mask+0.05: 3(1.837,2.917)
  silkscreen extent 0.19,0.03 3.49,4.18, body extent 0.18,0.89 3.48,4.19, height 1.1
IC-8VSSOP [mm]
  rect 0.75x0.25 smd: 1(0,1.5) 2(0,1) 3(0,0.5) 4(0,0) 5(3.3,0) 6(3.3,0.5) 7(3.3,1) 8(3.3,1.5)
  silkscreen extent -1.02,1.4 -0.76,1.65, body extent 0.1,-0.24 3.2,1.76, height 0.9
IC-10VSON [mm]
  rrect25% 0.6x0.24 smd mask+0: 1(-1.4,1) 2(-1.4,0.5) 3(-1.4,0) 4(-1.4,-0.5) 5(-1.4,-1) 6(1.4,-1) 7(1.4,-0.5) 8(1.4,0) 9(1.4,0.5) 10(1.4,1)
  round 0.368 hole 0.2 mask+0: 11(-0.508,0) 11(0,0.889) 11(0,-0.889) 11(0.508,0)
  rrect5% 1.65x2.4 smd paste-2 mask+0: 11(0,0)
  Top Layer region: 0.375,1.2 0.825,1.2 0.825,-1.2 0.375,-1.2 0.375,-1.7 0.125,-1.7 0.125,-1.2 -0.125,-1.2 -0.125,-1.7 -0.375,-1.7 -0.375,-1.2 -0.825,-1.2 -0.825,1.2 -0.375,1.2 -0.375,1.7 -0.125,1.7 -0.125,1.2 0.125,1.2 0.125,1.7 0.375,1.7
  silkscreen extent -2.39,-1.5 1.5,1.5, body extent -1.48,-1.48 1.52,1.52, height 1
IC-10WSON [mm]
  rect 0.6x0.3 smd: 1(-1.9,1.6) 2(-1.9,0.8) 3(-1.9,0) 4(-1.9,-0.8) 5(-1.9,-1.6) 6(1.9,-1.6) 7(1.9,-0.8) 8(1.9,0) 9(1.9,0.8) 10(1.9,1.6)
  rect 2.6x3 smd: 11(0,0)
  body extent -2,-2 2,2, height 0.8
IC-CURR [mm]
  oval 0.588x2.045 smd paste+0 mask+0.051: 1(-1.905,-2.772) 2(-0.635,-2.772) 3(0.635,-2.772) 4(1.905,-2.772) 5(1.905,2.772) 6(0.635,2.772) 7(-0.635,2.772) 8(-1.905,2.772)
  silkscreen extent -2.8,-2.92 2.53,1.52
IC-LQFP48 [mm]
  rect 1.194x0.305 smd paste+0 mask+0: 1(-4.25,2.75) 2(-4.25,2.25) 3(-4.25,1.75) 4(-4.25,1.25) 5(-4.25,0.75) 6(-4.25,0.25) 7(-4.25,-0.25) 8(-4.25,-0.75) 9(-4.25,-1.25) 10(-4.25,-1.75) 11(-4.25,-2.25) 12(-4.25,-2.75) 25(4.25,-2.75) 26(4.25,-2.25) 27(4.25,-1.75) 28(4.25,-1.25) 29(4.25,-0.75) 30(4.25,-0.25) 31(4.25,0.25) 32(4.25,0.75) 33(4.25,1.25) 34(4.25,1.75) 35(4.25,2.25) 36(4.25,2.75)
  rect 0.305x1.194 smd paste+0 mask+0: 13(-2.75,-4.25) 14(-2.25,-4.25) 15(-1.75,-4.25) 16(-1.25,-4.25) 17(-0.75,-4.25) 18(-0.25,-4.25) 19(0.25,-4.25) 20(0.75,-4.25) 21(1.25,-4.25) 22(1.75,-4.25) 23(2.25,-4.25) 24(2.75,-4.25) 37(2.75,4.25) 38(2.25,4.25) 39(1.75,4.25) 40(1.25,4.25) 41(0.75,4.25) 42(0.25,4.25) 43(-0.25,4.25) 44(-0.75,4.25) 45(-1.25,4.25) 46(-1.75,4.25) 47(-2.25,4.25) 48(-2.75,4.25)
  silkscreen extent -5.43,-5.35 5.35,5.35, body extent -4.5,-4.5 4.5,4.5, height 1.6
IC-SOT23-3 [mm]
  rect 0.6x0.7 smd: 1(-0.95,-1) 2(0.95,-1) 3(0,1)
  body extent -1.46,-1.18 1.46,1.19, height 1.12
IC-SOT-223-4 [mm]
  rect 1.4x1.2 smd mask+0.07: 1(-3,2.3) 3(-3,-2.3) 4(-3,0)
  rect 1.4x3.5 smd: 2(3,0)
  body extent -3.5,-3.25 3.5,3.25, height 1.68
IND-15U-0002 [mm] "12V Buck"
  rect 3.3x3.4 smd paste+0 mask+0: 1(3.175,7.62) 1(8.001,7.62) 2(3.175,1.524) 2(8.001,1.524)
  silkscreen extent 5.08,-0.25 6.11,9.4, body extent -0.19,-0.33 11.11,9.47, height 10.79
IND_IHLP_2525_CZ_VIS [mil]
  rect 88x135 smd paste+0 mask+0: 1(-104.5,0) 2(104.5,0)
  Top Layer keep-out region: -58.5,-69.5 -58.5,69.5 58.5,69.5 58.5,-69.5
  Top Layer keep-out region: -140.5,69.5 -140.5,130.5 140.5,130.5 140.5,69.5
  Top Layer keep-out region: -140.5,-130.5 -140.5,-69.5 140.5,-69.5 140.5,-130.5
  Keep-Out Layer region: -58.5,-69.5 -58.5,69.5 58.5,69.5 58.5,-69.5
  silkscreen extent -195,-138 148,138, body extent -143,-133 143,133, height 120
LED-0603 [mm]
  rect 0.8x0.8 smd: 1(2.291,0.751) 2(0.589,0.751)
  silkscreen extent -0.2,0.34 1.52,1.13, body extent 0.65,0.36 2.25,1.16, height 0.39
RES-0402 [mm]
  rect 0.6x0.7 smd: 1(-0.5,0) 2(0.5,0)
  body extent -0.5,-0.25 0.5,0.25, height 0.3
RES-0603 [mm]
  rect 1.15x1.1 smd: 1(-0.8,0) 2(0.8,0)
  body extent -0.8,-0.4 0.8,0.4, height 0.43
RES-0805 [mm]
  rect 1.2x1.2 smd: 1(-0.95,0) 2(0.95,0)
  body extent -1,-0.6 1,0.6, height 0.71
RES-1210 [mm] "Chip Resistor, 2-Leads, Body 3.10x2.60mm, IPC High Density"
  rect 0.95x2.6 smd: 1(-1.275,0) 2(1.275,0)
  body extent -1.6,-1.35 1.6,1.35, height 0.6
RES-2512 [mm]
  rect 1.45x3.5 smd: 1(-1.65,0) 2(1.65,0)
RESC1607X60N [mm]
  rect 1.04x1.02 smd: 1(-0.735,0) 2(0.735,0)
  body extent -0.8,-0.4 0.8,0.4, height 0.55
SAMTEC_FTSH-107-01-L-DV-K [mm]
  rect 0.74x2.79 smd: 01(-3.81,-2.035) 02(-3.81,2.035) 03(-2.54,-2.035) 04(-2.54,2.035) 05(-1.27,-2.035) 06(-1.27,2.035) 07(0,-2.035) 08(0,2.035) 09(1.27,-2.035) 10(1.27,2.035) 11(2.54,-2.035) 12(2.54,2.035) 13(3.81,-2.035) 14(3.81,2.035)
  silkscreen extent -5.2,-2.13 4.53,1.72, body extent -4.45,-2.82 4.44,3.02, height 5.96
TEST-POINT-0001#1 [mm] "2024 miniature test point"
  round 1.3 hole 1: 1(0,0)
  body extent -1.27,-1.27 1.27,1.27, height 4.57
TEST-POINT-0001#2 [mm] "2024 miniature test point"
  round 1.3 hole 1: 1(-0.184,0)
  body extent -1.27,-1.27 1.27,1.27, height 4.57
WCAP-ATUL_8X11.5(DXL) [mm]
  round 1.308 hole 0.8: 1(1.75,0) 2(-1.75,0)
  silkscreen extent -4.1,-4.1 4.1,4.1, body extent -4.04,-4 3.94,3.99, height 11.39

## Part data
3V3 5V 7V 12V 24V EN_7V EN_12V FB_7V FB_12V GND M+ M- SW_7V SW_12V VBAT VBAT_FUSED VBAT_LDOS: library part TEST-POINT-0001, "Oranange PC Test Point, Miniature Phoisphor Bronze Silver Plating Through Hole Mounting Type"
7V_FUSE 12V_FUSE 24V_FUSE: library part FUSE-0001, "FUSE BLOK CARTRIDGE 125V 10A SMD", Fuse Current=8A, Voltage Rating=125V, ComponentLink2Description=Datasheet, ComponentLink2URL=https://www.littelfuse.com/~/media/electronics/datasheets/fuses/littelfuse_fuse_154_154t_154l_154tl_datasheet.pdf.pdf
7V_PGOOD 12V_PGOOD CAN_RX CAN_TX MDIR_1 MDIR_2: library part LED-0001, "LED YELLOW CLEAR 0603 SMD", Forward Current=30mA, Forward Voltage=2V, ComponentLink1Description=Datasheet, ComponentLink1URL=https://www.americanbrightled.com/pdffiles/led-components/smt/BL-HKC36G-AV-TRB.pdf
C1 C18 C26 C29 C36 C62 C71 C80: library part CAP-1U-0001, "CAP CER 1UF 50V X7R 0805", Capacitance="1.0 uF", Voltage="50 V", ComponentLink2Description=Datasheet, ComponentLink2URL=https://www.yageo.com/upload/media/product/productsearch/datasheet/mlcc/UPY-GPHC_X7R_6.3V-to-250V_24.pdf, Device Class=Ceramic, Size=0805
C2 C10 C17 C38 C64 C73 C82: library part CAP-10N-0001, "CAP CER 10000PF 50V C0G/NP0 0805", Capacitance=10nF, Voltage=50V, ComponentLink1Description=Datasheet, ComponentLink1URL=https://search.murata.co.jp/Ceramy/image/img/A01X/G101/ENG/GRM2195C1H103JA01-01.pdf, Device Class=Ceramic, Size=0805
C3 C14 C21 C25 C28 C30 C56 C78: library part CAP-100N-0001, "CAP CER 0.1UF 100V X7R 0603", Capacitance="100 nF", Voltage="100 V", ComponentLink1Description=Datasheet, ComponentLink1URL=https://www.yageo.com/upload/media/product/app/datasheet/mlcc/upy-np0x7r_mv_100-to-630v.pdf, Device Class=Ceramic, Size=0603
C4 C6 C7 C8 C12 C47 C48 C53 C54: library part CAP-0.1U-0001, "CAP CER 0.1UF 16V X7R 0402", Capacitance="100 nF", Voltage Rating="16 V", ComponentLink2Description=Datasheet, ComponentLink2URL=https://www.yageo.com/upload/media/product/productsearch/datasheet/mlcc/UPY-GPHC_X7R_6.3V-to-250V_24.pdf, Device Class=Ceramic, Size=0402
C5 C9: library part CAP-4.7U-0001, "CAP CER 4.7UF 25V X5R 0603", Capacitance="4.7 uF", Voltage=25V, Device Class=Ceramic, Size=0603
C11 C13: library part CAP-1U-0002, "CAP CER 1UF 16V X7R 0603", Capacitance="1.0 uF", Voltage=16V, Device Class=Ceramic, Size=0603
C15 C16 C19 C20 C22 C23 C24 C27 C39 C65 C74 C83: library part CAP-1N-0001, "CAP CER 1000PF 50V X7R 0402", Capacitance="1.0 nF", Voltage="50 V", ComponentLink2Description=Datasheet, ComponentLink2URL=http://www.yageo.com/documents/recent/UPY-GP_NP0_16V-to-50V_16.pdf, Device Class=Ceramic, Size=0402
C31 C32 C57 C58: library part CAP-2.2U-0001, "CAP CER 2.2UF 100V X7R 1206", Capacitance=2.2uF, Voltage=100V, ComponentLink1Description=Datasheet, ComponentLink1URL=https://www.yageo.com/upload/media/product/productsearch/datasheet/mlcc/UPY-GPHC_X7R_6.3V-to-250V_24.pdf, Device Class=Ceramic, Size=1206
C33 C59: library part CAP-2.7N-0001, "CAP CER 2700PF 50V C0G/NP0 0805", Capacitance=2.7nF, Voltage=50V, ComponentLink1Description=Datasheet, ComponentLink1URL=https://search.murata.co.jp/Ceramy/image/img/A01X/G101/ENG/GRM2165C1H272JA01-01.pdf, Device Class=Ceramic, Size=0805
C34: library part CAP-47U-0002, "CAP ALUM HYBRID 47UF 20% 35V SMD", Capacitance="47 uF", Voltage=35V, ComponentLink1Description=Datasheet, ComponentLink1URL=https://industrial.panasonic.com/cdbs/www-data/pdf/RDD0000/ABA0000C1234.pdf, Device Class=Electrolytic
C35 C61 C70 C79: library part CAP-10U-0002, "CAP CER 10UF 50V X7R 1210", Capacitance="10 uF", Voltage=50V, ComponentLink1Description=Datasheet, ComponentLink1URL=https://mm.digikey.com/Volume0/opasdata/d220001/medias/docus/41/CL32B106KBJNNNE_Spec.pdf, Device Class=Ceramic, Size=1210
C37 C63 C72 C81: library part CAP-0.1U-0002, "CAP CER 0.1UF 50V X7R 0805", Capacitance="100 nF", Voltage Rating="50 V", ComponentLink2Description=Datasheet, ComponentLink2URL=https://www.yageo.com/upload/media/product/productsearch/datasheet/mlcc/UPY-GPHC_X7R_6.3V-to-250V_24.pdf, Device Class=Ceramic, Size=0805
C40 C66 C75 C84: library part CAP-100P-0001, "CAP CER 100PF 50V C0G/NPO 0402", Capacitance="100 pF", Voltage=50V, ComponentLink1Description=Datasheet, ComponentLink1URL=https://www.yageo.com/upload/media/product/productsearch/datasheet/mlcc/UPY-GP_NP0_16V-to-50V_18.pdf, Device Class=Ceramic, Size=0402
C41 C67 C76 C85: library part CAP-10P-0001, "CAP CER 10PF 50V C0G/NPO 0402", Capacitance="10 pF", Voltage=50V, ComponentLink1Description=Datasheet, ComponentLink1URL=https://www.yageo.com/upload/media/product/productsearch/datasheet/mlcc/UPY-GP_NP0_16V-to-50V_18.pdf, Device Class=Ceramic, Size=0402
C42 C68: library part CAP-6.8P-0001, "CAP CER 6.8PF 100V C0G/NPO 0603", Capacitance=6.8pF, Voltage=100V, ComponentLink1Description=Datasheet, ComponentLink1URL=https://www.yageo.com/upload/media/product/productsearch/datasheet/mlcc/UPY-GPHC_X7R_6.3V-to-250V_24.pdf, Device Class=Ceramic, Size=0603
C43: library part CAP-510P-0001, "CAP CER 510PF 50V C0G/NP0 0402", Capacitance="510 pF", Voltage="50 V", ComponentLink2Description=Datasheet, ComponentLink2URL=https://www.mouser.com/ProductDetail/Walsin/0402N511J500CT?qs=u16ybLDytRbq33ukPPRl4A%3D%3D&srsltid=AfmBOoq1-HCbTRqPV3GtwyI6lHLBf095DSA3Qg1Qkiix4a-obr82TmJ6, Device Class=Ceramic, Size=0402
C44 C45 C50 C51: library part CAP-10U-0004, "CAP TANT 10UF 10% 16V 1206", Capacitance="10 uF", Voltage=16V, ComponentLink1Description=Datasheet, ComponentLink1URL=https://www.lcsc.com/datasheet/lcsc_datasheet_2304140030_Vishay-Intertech-293D106X9016A2TE3_C110038.pdf, Device Class=Tantalum, Size=1206
C46 C52: library part CAP-10U-0001, "CAP CER 10UF 10V X5R 0603", Capacitance="10 uF", Voltage=10V, ComponentLink1Description=Datasheet, ComponentLink1URL=https://www.yageo.com/upload/media/product/app/datasheet/mlcc/upy-gphc_x5r_4v-to-50v.pdf, Device Class=Ceramic, Size=0603
C49 C55: library part CAP-470P-0001, "CAP CER 470PF 50V C0G/NPO 0805", Capacitance="470 pF", Voltage=50V, ComponentLink1Description=Datasheet, ComponentLink1URL=https://www.yageo.com/upload/media/product/productsearch/datasheet/mlcc/UPY-GP_NP0_16V-to-50V_18.pdf, Device Class=Ceramic, Size=0805
C60: library part CAP-47U-0003, "CAP CER 47UF 16V X5R 1210", Capacitance="47 uF", Voltage=16V, ComponentLink1Description=Datasheet, ComponentLink1URL=https://search.murata.co.jp/Ceramy/image/img/A01X/G101/ENG/GRM32ER61C476KE15-01.pdf, Device Class=Ceramic, Size=1210
C69: library part CAP-3N-0001, "3000 pF ±5% 50V Ceramic Capacitor C0G, NP0 0603 (1608 Metric)", Capacitance="3 nF", Voltage=50V, ComponentLink1Description=Datasheet, ComponentLink1URL=https://mm.digikey.com/Volume0/opasdata/d220001/medias/docus/41/CL32B106KBJNNNE_Spec.pdf, Device Class=Ceramic, Size=1210
C77 C86: library part CAP-100u-0001, "100 µF 50 V Aluminum Electrolytic Capacitors Radial, Can 7000 Hrs @ 105°C", Capacitance=100uF, Package=None, Voltage=50V, Availability=Unavailable, ComponentLink1Description=Datasheet, ComponentLink1URL=https://www.we-online.com/components/products/datasheet/860040674004.pdf, MF="{'manufacturer': u'W\xfcrth Elektronik'}", MP=860040674004, Price=None
D3 D4 D5 D6 D9 D10 D11 D12: library part DIO-SCHOTTKY-0003, "DIODE SCHOTTKY 60V 3A SOD128", Current Rating=3A, Reverse Voltage=60V, ComponentLink1Description=Datasheet, ComponentLink1URL=https://assets.nexperia.com/documents/data-sheet/PMEG6030EP.pdf
D7 D8 D13 D14: library part DIO-TVS-0002, "TVS DIODE 12VWM 19.9VC DO214AA", Current Rating=30.2A, Standoff Voltage=12V, ComponentLink1Description=Datasheet, ComponentLink1URL=https://www.littelfuse.com/media?resourcetype=datasheets&itemid=09a6ae9a-73cb-4ac4-acac-e6dab92ab953&filename=littelfuse_tvs_diode_smbj_datasheet.pdf
D18 D20: library part DIO-SCHOTTKY-0001, "DIODE SCHOTTKY 60V 7A POWERDI5", Forward Current=7A, Reverse Voltage (DC)=60V, ComponentLink1Description=Datasheet, ComponentLink1URL=https://www.diodes.com/assets/Datasheets/PDS760.pdf
D21 D22: library part DIO-TVS-0001, "TVS DIODE 40VWM 64.5VC DO214AA", Current Rating=9.3A, Voltage Rating=64.5V, ComponentLink1Description=Datasheet, ComponentLink1URL=https://www.littelfuse.com/media?resourcetype=datasheets&itemid=09a6ae9a-73cb-4ac4-acac-e6dab92ab953&filename=littelfuse_tvs_diode_smbj_datasheet.pdf
F1: library part FUSE-0002, "FUSE BRD MT 250MA 32VAC 32VDC", Fuse Current=250mA, Voltage Rating=32V, ComponentLink2Description=Datasheet, ComponentLink2URL=https://www.littelfuse.com/media?resourcetype=datasheets&itemid=4a59f034-1cca-460e-a5ba-e1e66247c76d&filename=littelfuse_fuse_467_datasheet.pdf
I1: library part IC_LDO_3V3_0001, "IC REG LIN 3.3V 800MA SOT223-4", ComponentLink1Description="New link", ComponentLink1URL=https://www.ti.com/lit/ds/symlink/lm1117.pdf?HQS=dis-dk-null-digikeymode-dsf-pf-null-wwe&ts=1721700739746
I2: library part IC_LDO_5V_0001, "IC REG LINEAR 5V 800MA SOT223-4", ComponentLink1Description=Datasheet, ComponentLink1URL=https://www.ti.com/lit/ds/symlink/lm1117.pdf?HQS=dis-dk-null-digikeymode-dsf-pf-null-wwe&ts=1721700739746
J4: library part CONN_Flashing-0001, "Connector Header Surface Mount 14 position 0.050\" (1.27mm)", Package=None, Availability=Unavailable, ComponentLink1Description=Datasheet, ComponentLink1URL=https://mm.digikey.com/Volume0/opasdata/d220001/medias/docus/6209/ftsh-1xx-xx-xxx-dv-xxx-xxx-x-xx-mkt.pdf, MF=Samtec, MP=FTSH-107-01-L-DV-K, Price=None
L1: library part IND-15U-0002-NoJLC, "SMD MOLDING POWER CHOKE", Current Rating=6A, Inductance=15uH, ComponentLink1Description=Datasheet, ComponentLink1URL=https://www.digikey.com/en/products/detail/codaca/CSAD1010-150M/16633512?s=N4IgjCBcoBwAxVAYygMwIYBsDOBTANCAPZQDaIALHAExwDMEAuoQA4AuUIAymwE4CWAOwDmIAL6Ew1MAE5EIFJAw4CxMiGoy6AdmoUQhajGqa6BjTDp6zhywFY4c23UtOLFbVXPVtYK3e9dODsbdwA2OxgQZhB2Th4BEXFJTQhoBTQsPEISSHITS0do1g5Ibj4hUQkNOBhteTiygFVBfjYAeVQAWVx0bABXXlxzfs4AVoAJcwBbIU4wAMJp9AAPeYDq2hgo9MaQFrbOnr7B4cJRsoBBGbmyuwA6DcIAWmp5RT5%2B1VzyAMYxAFAA
L2: library part IND-10U-0002, "IHLP-2525CZ-11 10 20% ER E3", Current=4A, Inductance=10uH, Manufacturer_Name=Vishay, ComponentLink1Description=Datasheet, ComponentLink1URL=https://www.vishay.com/docs/34190/ihlp-2525cz-11.pdf, Copyright="Copyright (C) 2025 Ultra Librarian. All rights reserved.", Datasheet=https://www.vishay.com/doc?34190, Manufacturer_Part_Number=IHLP2525CZER100M11
Q1 Q4 Q5 Q6: library part NMOS-26A-0001, "MOSFET N-CH 30V 60A 8VSON", Continuous Current=60A, Voltage=30V, ComponentLink1Description=Datasheet, ComponentLink1URL=https://www.ti.com/lit/ds/symlink/csd17575q3.pdf?ts=1728565072242&ref_url=https%253A%252F%252Fwww.mouser.co.uk%252F
Q2 Q3 Q7 Q8: library part NMOS-200MA-0001, "MOSFET N-CH 60V 200MA SOT23", Continuous Current=200mA, Voltage=60V, ComponentLink1Description=Datasheet, ComponentLink1URL=https://toshiba.semicon-storage.com/info/T2N7002AK_datasheet_en_20150401.pdf?did=29712&prodName=T2N7002AK
Q9 Q10: library part NMOS-60A-0001, "MOSFET N-CH 60V 12A/60A 8VSON", Continuous Current=60A, Voltage=60V, ComponentLink2Description=Datasheet, ComponentLink2URL=http://www.ti.com/lit/ds/symlink/csd18543q3a.pdf
R1 R10: library part RES-1-0001, "RES SMD 1 OHM 5% 1/10W 0402", Power=1/10W, Resistance=1.0R, Tolerance=5%, ComponentLink1Description=Datasheet, ComponentLink1URL=https://api.pim.na.industrial.panasonic.com/file_stream/main/fileversion/1242, Size=0402
R2: library part RES-0-0003, "0 Ohms Jumper Chip Resistor 0603 (1608 Metric) Moisture Resistant Thick Film", JLC part number=C106231, Power=1/10W, Resistance="0 Ohm", Assembled?=yes
R3 R4: library part RES-4.7k-0001, "RES 4.7K OHM 1% 1/10W 0603", Power=1/10W, Resistance=4.7k, Tolerance=1%, ComponentLink1Description=Datasheet, ComponentLink1URL=https://www.yageo.com/upload/media/product/products/datasheet/rchip/PYu-RC_Group_51_RoHS_L_12.pdf, Size=0603
R5: library part RES-120-0001, "RES 120 OHM 1% 1/2W 1210", Power=1/2W, Resistance=120R, Tolerance=1%, ComponentLink1Description=Datasheet, ComponentLink1URL=https://www.yageo.com/upload/media/product/products/datasheet/rchip/PYu-RC_Group_51_RoHS_L_12.pdf, Size=1210
R6 R8 R19 R20: library part RES-100-0001, "RES 100 OHM 1% 1/16W 0402", Power=1/16W, Resistance=100R, Tolerance=1%, ComponentLink1Description=Datasheet, ComponentLink1URL=https://www.yageo.com/upload/media/product/products/datasheet/rchip/PYu-RC_Group_51_RoHS_L_12.pdf, Size=0402
R7 R9: library part RES-470-0001, "RES 470 OHM 1% 1/16W 0402", Power=1/16W, Resistance=470R, Tolerance=1%, ComponentLink1Description=Datasheet, ComponentLink1URL=https://www.yageo.com/upload/media/product/products/datasheet/rchip/PYu-RC_Group_51_RoHS_L_12.pdf, Size=0402
R11 R12 R13 R14 R15 R16 R17 R18: library part RES-33-0001, "RES 33 OHM 1% 1/8W 0402", Power=1/8W, Resistance=33R, Tolerance=1%, ComponentLink1Description=Datasheet, ComponentLink1URL=https://www.yageo.com/upload/media/product/products/datasheet/rchip/PYu-RC_Group_51_RoHS_L_12.pdf, Size=0402
R21 R29: library part RES-240-0001, "240R 0.063W 1% 0402 (1005 Metric)  SMD", Power=1/16W, Resistance=240R, Tolerance=1%, ComponentLink1Description=Datasheet, ComponentLink1URL=https://www.yageo.com/upload/media/product/products/datasheet/rchip/PYu-RC_Group_51_RoHS_L_12.pdf, Size=0402
R22 R30: library part RES-1k-0001, "RES 1K OHM 1% 1/16W 0402", Power=1/16W, Resistance=1k, Tolerance=1%, ComponentLink1Description=Datasheet, ComponentLink1URL=https://www.yageo.com/upload/media/product/products/datasheet/rchip/PYu-RC_Group_51_RoHS_L_12.pdf, Size=0402
R23 R31: library part RES-2.15M-0001, "RES SMD 2.15M OHM 1% 1/10W 0603", Power=1/10W, Resistance=2.15M, Tolerance=1%, ComponentLink1Description=Datasheet, ComponentLink1URL=https://www.yageo.com/upload/media/product/products/datasheet/rchip/PYu-RC_Group_51_RoHS_L_12.pdf, Size=0603
R24: library part RES-147k-0001, "RES 147K OHM 1% 1/16W 0402", Power=1/16W, Resistance=147k, Tolerance=1%, ComponentLink1Description=Datasheet, ComponentLink1URL=https://www.yageo.com/upload/media/product/products/datasheet/rchip/PYu-RC_Group_51_RoHS_L_12.pdf, Size=0402
R25 R34: library part RES-178k-0001, "62.5mW Thick Film Resistors 50V ±100ppm/℃ ±1% 178kΩ 0402 Chip Resistor - Surface Mount ROHS", Power=1/16W, Resistance=178k, Tolerance=1%, ComponentLink1Description=Datasheet, ComponentLink1URL=https://www.lcsc.com/datasheet/lcsc_datasheet_2304140030_RALEC-RTT021783FTH_C102842.pdf, Size=0402
R26 R33 R38 R44: library part RES-100k-0001, "RES SMD 100K OHM 1% 1/10W 0603", Power=100mW, Resistance=100k, Tolerance=1%, ComponentLink1Description=Datasheet, ComponentLink1URL=https://www.yageo.com/upload/media/product/products/datasheet/rchip/PYu-RC_Group_51_RoHS_L_12.pdf, Size=0603
R27: library part RES-59k-0001, "RES 59K OHM 1% 1/16W 0402", Power=1/16W, Resistance=59k, Tolerance=1%, ComponentLink1Description=Datasheet, ComponentLink1URL=https://www.digikey.com/en/products/detail/yageo/RC0402FR-0759KL/2827634?s=N4IgTCBcDaIEoGEAMAWJYBicC0SDsArAJwDSAMiALoC%2BQA, Size=0402
R28: library part RES-10.5k-0001, "RES 10.5K OHM 1% 1/16W 0402", Power=1/16W, Resistance=10.5k, Tolerance=1%, ComponentLink1Description=Datasheet, ComponentLink1URL=https://www.yageo.com/upload/media/product/products/datasheet/rchip/PYu-RC_Group_51_RoHS_L_12.pdf, Size=0402
R32: library part RES-80.6k-0001, "80.6 kOhms ±1% 0.063W, 1/16W Chip Resistor 0402 (1005 Metric) Moisture Resistant Thick Film", Power=1/16W, Resistance=80.6k, Tolerance=1%, ComponentLink1Description=Datasheet, ComponentLink1URL=https://www.yageo.com/upload/media/product/products/datasheet/rchip/PYu-RC_Group_51_RoHS_L_12.pdf, Size=0402
R35: library part RES-36.5k-0001, "36.5 kOhms ±1% 0.063W, 1/16W Chip Resistor 0402 (1005 Metric) Moisture Resistant Thick Film", Power=1/16W, Resistance=36.5k
R36: library part RES-10.4k-0001, "10.4 kOhms ±0.1% 0.125W, 1/8W Chip Resistor 0805 (2012 Metric) Thin Film", Power=1/8W, Resistance=10.4k, Tolerance=1%, ComponentLink1Description=Datasheet, ComponentLink1URL=https://www.yageo.com/upload/media/product/products/datasheet/rchip/PYu-RC_Group_51_RoHS_L_12.pdf, Size=0402
R37 R43: library part RES-200k-0001, "RES SMD 200K OHM 1% 1/10W 0603", Power=100mW, Resistance=200k, Tolerance=1%, ComponentLink1Description=Datasheet, ComponentLink1URL=https://www.yageo.com/upload/media/product/products/datasheet/rchip/PYu-RC_Group_51_RoHS_L_12.pdf, Size=0603
R39 R40 R41: library part RES-0.5m-0001, "2512 Chip Resistor - Surface Mount ROHS", Power=3W, Resistance=0.5m, Tolerance=1%, ComponentLink1Description=Datasheet, ComponentLink1URL=https://www.yageo.com/upload/media/product/products/datasheet/rchip/PYu-RC_Group_51_RoHS_L_12.pdf, Size=0402
R42: library part RES-10k-0001, "RES 10K OHM 1% 1/16W 0402", Power=1/16W, Resistance=10k, Tolerance=1%, ComponentLink1Description=Datasheet, ComponentLink1URL=https://www.yageo.com/upload/media/product/products/datasheet/rchip/PYu-RC_Group_51_RoHS_L_12.pdf, Size=0402
U1 U4: library part IC-GTDR-0001, "IC GATE DRVR HALF-BRIDGE 10VSON", Package=10-VSON, ComponentLink1Description=Datasheet, ComponentLink1URL=https://www.ti.com/lit/ds/symlink/ucc27282.pdf?HQS=dis-dk-null-digikeymode-dsf-pf-null-wwe&ts=1728563165008&ref_url=https%253A%252F%252Fwww.ti.com, VCC Max=16
U2: library part IC-STM32G431CBT6, "IC MCU 32BIT 128KB FLASH 48LQFP", Package=48LQFP, ComponentLink1Description=Datasheet, ComponentLink1URL=https://www.st.com/resource/en/datasheet/stm32g431cb.pdf
U3: library part IC-CAN-0001, "IC TRANSCEIVER 1/1 8SOIC", ComponentLink1Description=Datasheet, ComponentLink1URL=https://www.ti.com/lit/ds/symlink/tcan1044-q1.pdf?HQS=dis-dk-null-digikeymode-dsf-pf-null-wwe&ts=1728758303289&ref_url=https%253A%252F%252Fwww.ti.com%252Fgeneral%252Fdocs%252Fsuppproductinfo.tsp%253FdistId%253D10%2526gotoUrl%253Dhttps%253A%252F%252Fwww.ti.com%252Flit%252Fgpn%252Ftcan1044-q1
U5 U6: library part IC-MUX-0001, "Multiplexer 1 x 2:1 8-VSSOP", ComponentLink1Description=Datasheet, ComponentLink1URL=https://www.ti.com/general/docs/suppproductinfo.tsp?distId=10&gotoUrl=https%3A%2F%2Fwww.ti.com%2Flit%2Fgpn%2Fsn74lvc2g157
U7 U8: library part IC-BUCK-0001, "IC REG BUCK ADJ 5A 10WSON", ComponentLink1Description=Datasheet, ComponentLink1URL=https://www.ti.com/general/docs/suppproductinfo.tsp?distId=10&gotoUrl=https%3A%2F%2Fwww.ti.com%2Flit%2Fgpn%2Ftps54561
U9: "Current Sense Amplifier 1 Circuit 8-MSOP"
X1 X3 X11: library part HEADER_POS4_?43045-0401, Package=43045-0400, DeviceName=43045-0401, DeviceSetName=HEADER_POS4_?, GateName_1=G$1, LibraryName=con-molex-micro-fit-3_0_2, SymbolName_1=HEADER_POS4
X2 X4: library part "Micro-Fit Molex 6 Pin 2 Row Right Angle", Package=43045-0600, DeviceName=43045-0600, DeviceSetName=HEADER_POS6_?, GateName_1=G$1, LibraryName=con-molex-micro-fit-3_0_2, SymbolName_1=HEADER_POS6
X5 X6: library part "Micro-Fit Molex 3 Pin Right Angle", Package=43650-0300, DeviceName=43650-0300, DeviceSetName=HEADER_POS3_?, GateName_1=G$1, LibraryName=con-molex-micro-fit-3_0_2, SymbolName_1=HEADER_POS3
X8: library part HEADER_POS2_43045-0200, Package=43045-0200, DeviceName=43045-0200, DeviceSetName=HEADER_POS2_?, GateName_1=G$1, LibraryName=con-molex-micro-fit-3_0_2, SymbolName_1=HEADER_POS2
X10: library part HEADER_POS2_?43650-0200

## Free pads (board coordinates)
  round 6.35 hole 3.35: ""(0,0) ""(0,54.1) ""(60,54.1) ""(89,0)

## Via types
v1: diameter 0.605, hole 0.305, Top Layer to Bottom Layer, 241 vias
v2: diameter 0.605, hole 0.305, Top Layer to Bottom Layer, tented both sides, 12 vias
v3: diameter 0.45, hole 0.2, Top Layer to Bottom Layer, 3 vias

## Nets (pads, with @x,y where several pads share a name; then routed paths per layer and width w, separated by ;. In a path a pad name is that pad's centre, name@x,y a point inside that pad or via, vN(x,y) a via of type N, cw(c..) or ccw(c..) an arc to the next point about the centre after c; other vN are vias at no path point)
3V3: 3V3.1 C4.1 C5.1 C6.1 C7.1 C8.1 C9.1 C10.1 C11.1 C12.1 C13.1 C24.1 C25.1 C26.1 C27.1 C28.1 C29.1 C45.1 C46.1 C47.1 C48.1 C49.1 F1.1 I1.2 I1.4 J4.03 R3.2 R4.2 R6.2 R8.2 U2.1 U2.20 U2.21 U2.24 U2.36 U2.48 U3.5 U5.8 U6.8 U9.6 U9.7 X4.P$4 | length 16.7
  Top Layer w0.508: I1.2@62.973,34.46 63.419,34.906 65.006,34.906 66,35.9 3V3.1@67.7,35.9 3V3.1@67.766,35.9 ; v1(74.9,57.5) 74.919,57.481 74.919,55.356 J4.03@74.94,55.335
  Bottom Layer w0.508: v1(71.9,10.5) 71.919,10.481 71.919,9.906 73.4,8.425 R3.2@73.4,8.4 73.45,8.45 76.35,8.45 R4.2@76.4,8.5 ; v1(78.7,11.6) 78.7,11.574 79.4,10.874 F1.1@79.4,8.5
  other v1: 66,10.1 66,10.9 9.5,13.4 53.3,13.8 65.9,16.8 57.6,19.5 57.6,20.6 57.6,21.3 46.7,23.9 47.4,23.9 68.3,25.1 65.9,27.3 67.7,30.9 68.5,30.9 62.05,32.4 63.5,32.5 61.8,33.9 63.552,34.159 61.8,34.9 63.1,41.8
5V: 5V.1 C51.1 C52.1 C53.1 C54.1 C55.1 I2.2 I2.4 R21.1 R22.1 R29.1 R30.1 U3.3 X1.P$1 | length 6.9
  Top Layer w0.508: R30.1@55.058,36.803 R30.1@55.058,36.803 55.798,36.802 v1(55.8,36.8) R29.1@56.5,36.8 ; R22.1@55.169,31.05 55.2,31.019 55.781,31.019 v1(55.8,31) R21.1@56.5,31 ; 5V.1@59.1,48.2 59.1,46.7 60.01,45.79 I2.4@61.288,45.79
  other v1: 73.7,13.7 74.4,13.7 68.3,45 68.3,45.9 68.3,46.8
7V: 7V.1 C44.1 C50.1 C60.1 C61.1 C62.1 C63.1 C64.1 C65.1 C66.1 C67.1 I1.3 I2.3 L2.1 R32.1 | length 4.5
  Top Layer w0.508: 7V.1@48.4,38.3 48.4,39.9 49.9,41.4 v1(50.7,41.4)
  other v1: 60,40.875 59.1,41.1 52.6,41.4 54.4,41.4 55.9,41.4 57,41.4 58.2,41.4 59.3,41.9 59.2,42.9
12/24V: D5.2 D6.2 Q1.3 Q4.3 R40.1 U9.1
12/24VC: R39.2 R40.2 R41.2 U9.8
12V: 12V.1 C34.2 C35.1 C36.1 C37.1 C38.1 C39.1 C40.1 C41.1 L1.2 R1.2 R10.2 R24.1 R39.1
  other v1: 32.8,27.3 34.1,27.3 35.2,27.3 36.7,27.3 38.5,27.4 40.5,27.4